# EAGLE board PWM_Block-GiantPanel-v10 (EAGLE 6.6.0), part 1 of 15
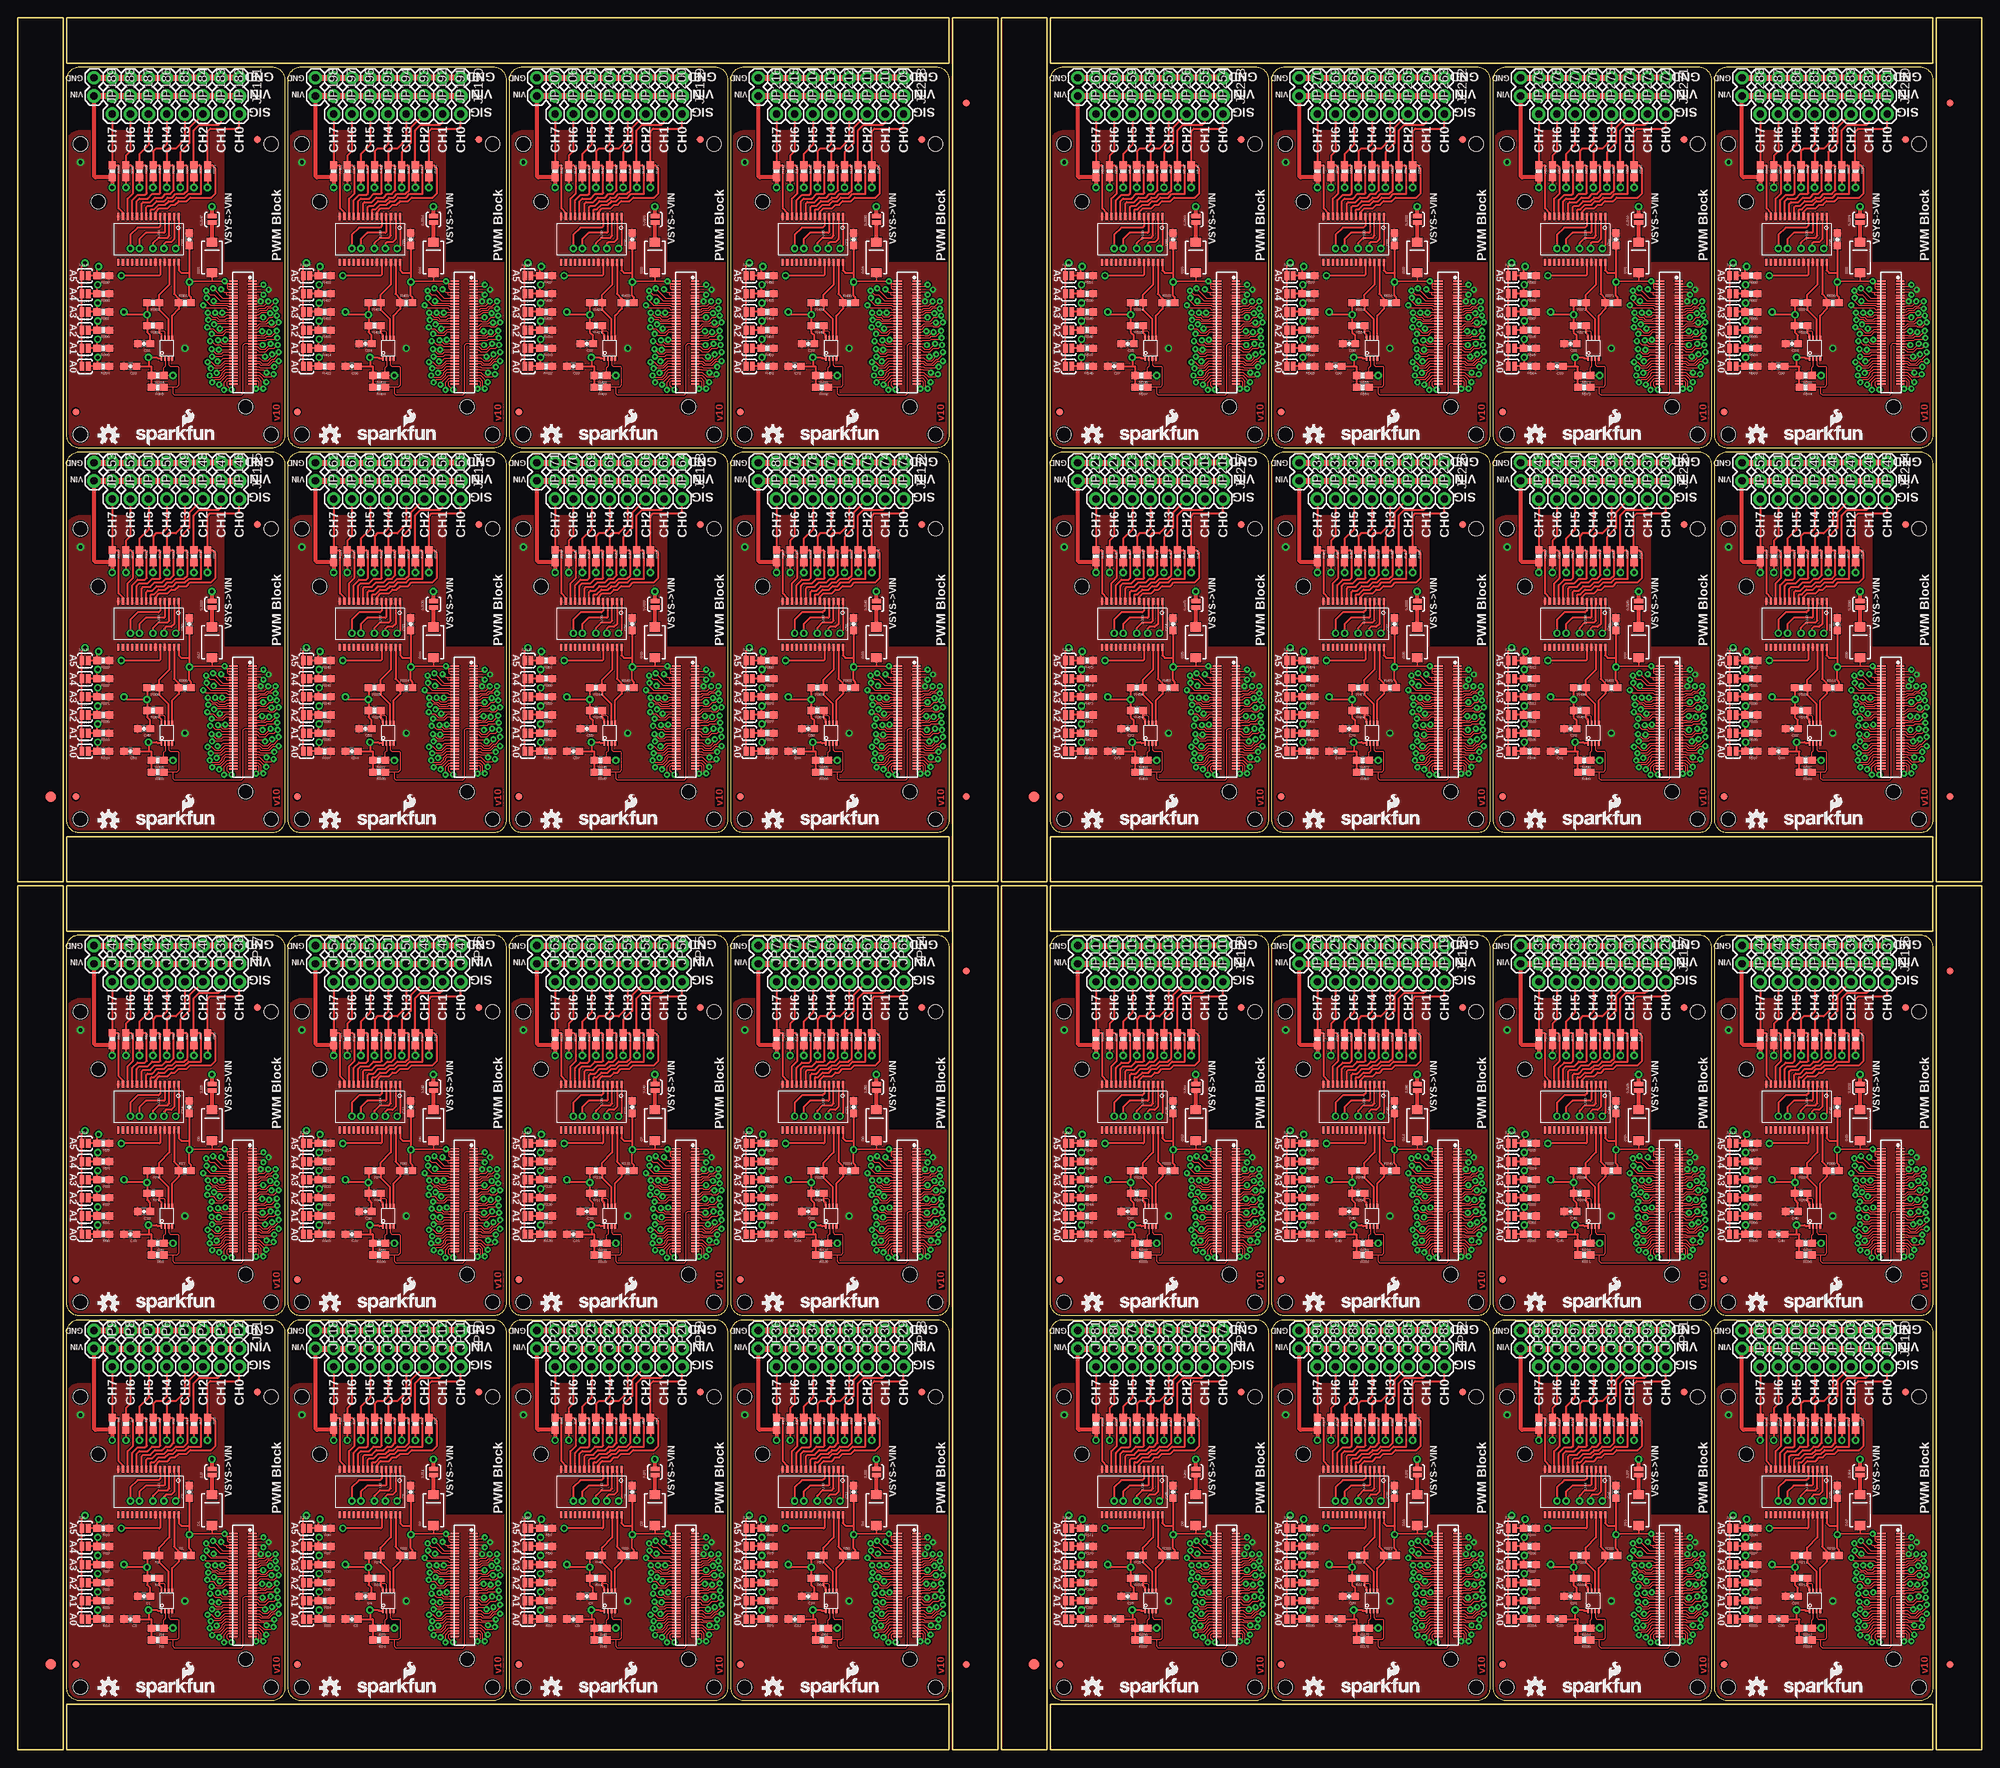
[diagram p0: board, top side]
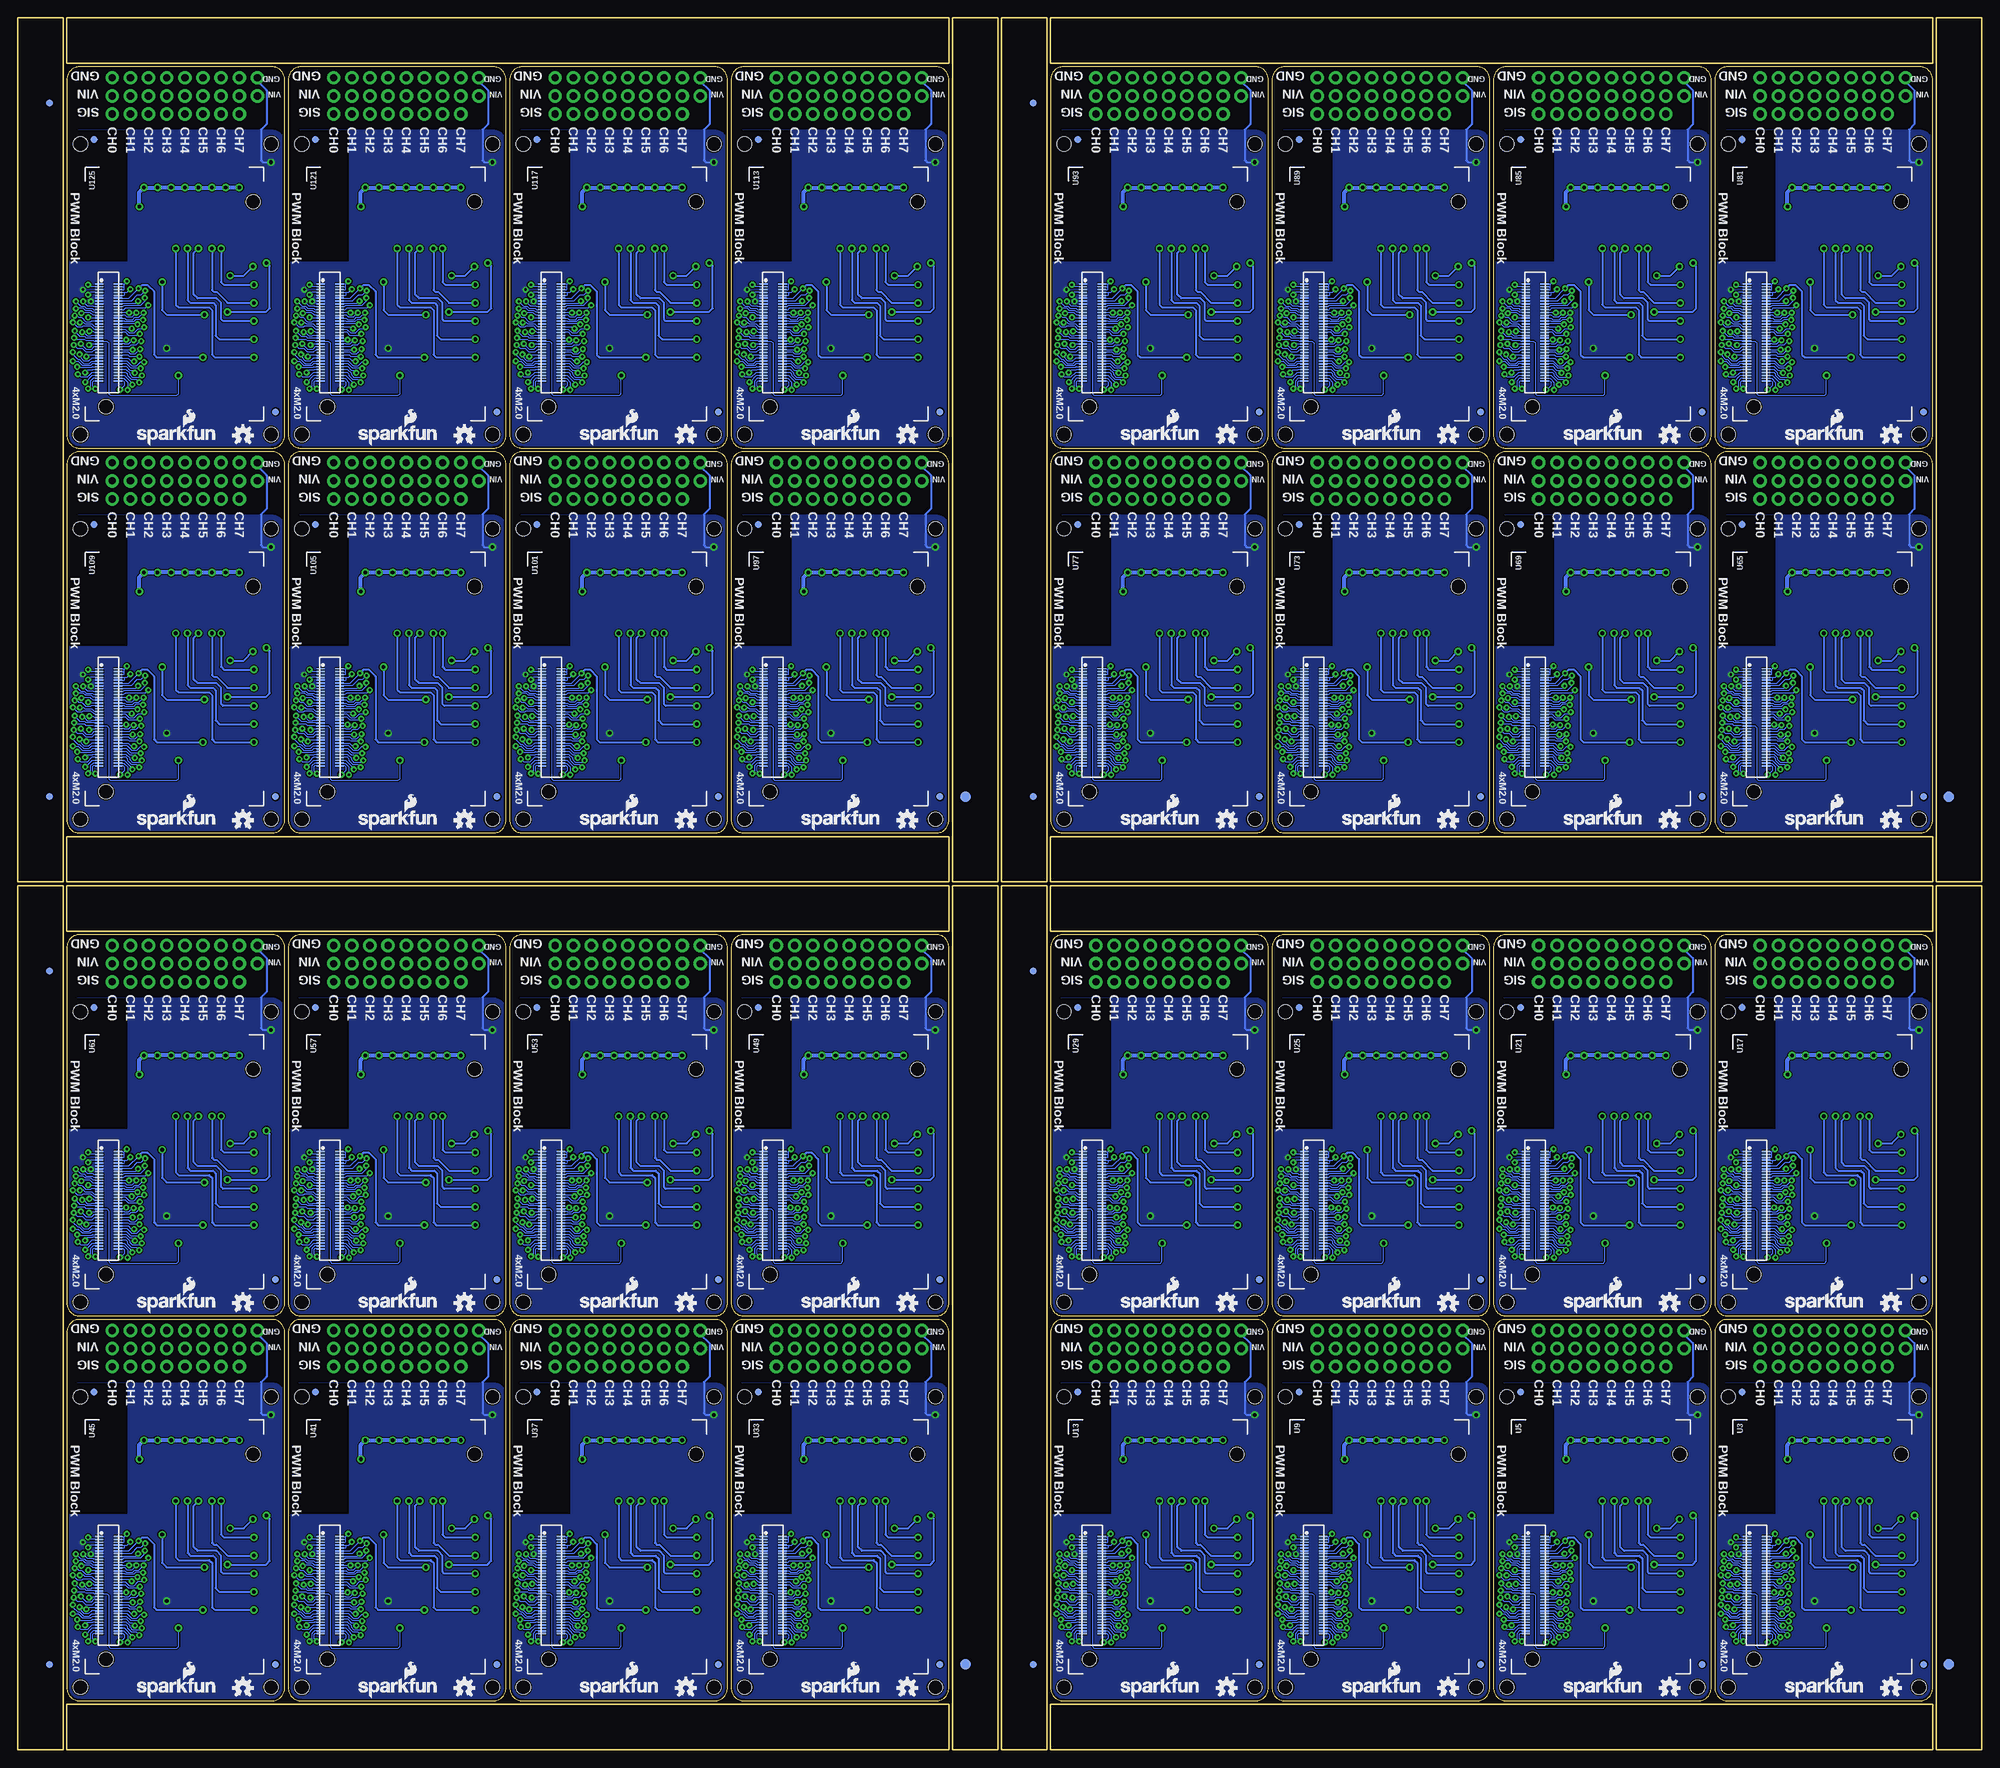
[diagram p1: board, bottom side, seen from below]

Size 274.83 x 242.32 mm. Coordinates in mm from the lower left corner, seen from the top.
Outline: 320 segments
Copper layers (1*16): Top 0.035mm / dielectric 1.5mm / Bottom 0.035mm
Design rules "SparkFun-2-layer *": minimum track width 6mil, minimum drill 13mil, track to track 6mil, track to pad 6mil, pad to pad 6mil, via to via 6mil, smd to smd 6mil, copper to edge 8mil, drill to drill 8mil, minimum pad ring 12mil, minimum via ring 10mil, stop-mask expansion 4mil, vias tented up to drill 20mil, thermal gap 6mil
Holes 2 mm at 35.43,8.76 8.76,8.76 8.76,49.4 35.43,49.4 66.42,8.76 39.75,8.76 39.75,49.4 66.42,49.4 97.41,8.76 70.74,8.76 70.74,49.4 97.41,49.4 128.4,8.76 101.73,8.76 101.73,49.4 128.4,49.4 35.43,62.61 8.76,62.61 8.76,103.25 35.43,103.25 66.42,62.61 39.75,62.61 39.75,103.25 66.42,103.25 97.41,62.61 70.74,62.61 70.74,103.25 97.41,103.25 128.4,62.61 101.73,62.61 101.73,103.25 128.4,103.25 173.1,8.76 146.43,8.76 146.43,49.4 173.1,49.4 204.09,8.76 177.42,8.76 177.42,49.4 204.09,49.4 235.08,8.76 208.41,8.76 208.41,49.4 235.08,49.4 266.06,8.76 239.4,8.76 239.4,49.4 266.06,49.4 173.1,62.61 146.43,62.61 146.43,103.25 173.1,103.25 204.09,62.61 177.42,62.61 177.42,103.25 204.09,103.25 235.08,62.61 208.41,62.61 208.41,103.25 235.08,103.25 266.06,62.61 239.4,62.61 239.4,103.25 266.06,103.25 35.43,130.18 8.76,130.18 8.76,170.81 35.43,170.81 66.42,130.18 39.75,130.18 39.75,170.81 66.42,170.81 97.41,130.18 70.74,130.18 70.74,170.81 97.41,170.81 128.4,130.18 101.73,130.18 101.73,170.81 128.4,170.81 35.43,184.02 8.76,184.02 8.76,224.66 35.43,224.66 66.42,184.02 39.75,184.02 39.75,224.66 66.42,224.66 97.41,184.02 70.74,184.02 70.74,224.66 97.41,224.66 128.4,184.02 101.73,184.02 101.73,224.66 128.4,224.66 173.1,130.18 146.43,130.18 146.43,170.81 173.1,170.81 204.09,130.18 177.42,130.18 177.42,170.81 204.09,170.81 235.08,130.18 208.41,130.18 208.41,170.81 235.08,170.81 266.06,130.18 239.4,130.18 239.4,170.81 266.06,170.81 173.1,184.02 146.43,184.02 146.43,224.66 173.1,224.66 204.09,184.02 177.42,184.02 177.42,224.66 204.09,224.66 235.08,184.02 208.41,184.02 208.41,224.66 235.08,224.66 266.06,184.02 239.4,184.02 239.4,224.66 266.06,224.66
tRestrict: area 29,33 to 37.3,51.3; area 59.9,33 to 68.3,51.3; area 90.9,33 to 99.3,51.3; area 121.9,33 to 130.3,51.3; area 29,86.9 to 37.3,105.2; area 59.9,86.9 to 68.3,105.2; area 90.9,86.9 to 99.3,105.2; area 121.9,86.9 to 130.3,105.2; area 166.6,33 to 175,51.3; area 197.6,33 to 206,51.3; area 228.6,33 to 237,51.3; area 259.6,33 to 268,51.3; 20 more areas; 32 lines
bRestrict: area 29,33 to 37.3,51.3; area 59.9,33 to 68.3,51.3; area 90.9,33 to 99.3,51.3; area 121.9,33 to 130.3,51.3; area 29,86.9 to 37.3,105.2; area 59.9,86.9 to 68.3,105.2; area 90.9,86.9 to 99.3,105.2; area 121.9,86.9 to 130.3,105.2; area 166.6,33 to 175,51.3; area 197.6,33 to 206,51.3; area 228.6,33 to 237,51.3; area 259.6,33 to 268,51.3; 20 more areas

## Footprints (pad centres in the part's own frame; a part is rotated, then mirrored left to right if it is on the bottom)
0603-CAP = smd 1.1 x 1: 1 -0.85,0; 2 0.85,0
SMA-DIODE = smd 1.27 x 1.47: A -2.15,0; C 2.15,0
FIDUCIAL-1.5X3 = smd 1.5 x 1.5: 1 0,0
FIDUCIAL-1X2 = smd 1 x 1: 1 0,0
1X03 = drill 1.016 pad 1.88: 1 0,0; 2 2.54,0; 3 5.08,0
1X02 = drill 1.016 pad 1.88: 1 0,0; 2 2.54,0
0603-RES = smd 1.1 x 1: 1 -0.85,0; 2 0.85,0
PAD-JUMPER-2-NO_YES_SILK = smd 0.635 x 1.27: 1 -0.45,0; 2 0.45,0
TSSOP-28_4MM = smd 1 x 0.3: 1 -3.2,4.225; 2 -3.2,3.575; 3 -3.2,2.925; 4 -3.2,2.275; 5 -3.2,1.625; 6 -3.2,0.975; 7 -3.2,0.325; 8 -3.2,-0.325; 9 -3.2,-0.975; 10 -3.2,-1.625; 11 -3.2,-2.275; 12 -3.2,-2.925; 13 -3.2,-3.575; 14 -3.2,-4.225; 15 3.2,-4.225; 16 3.2,-3.575; 17 3.2,-2.925; 18 3.2,-2.275; 19 3.2,-1.625; 20 3.2,-0.975; 21 3.2,-0.325; 22 3.2,0.325; 23 3.2,0.975; 24 3.2,1.625; 25 3.2,2.275; 26 3.2,2.925; 27 3.2,3.575; 28 3.2,4.225
PCA9306DC-1:1 = smd 0.25 x 0.602: 1 -0.73,-1.446; 2 -0.23,-1.446; 3 0.27,-1.446; 4 0.77,-1.446; 5 0.77,1.431; 6 0.27,1.431; 7 -0.23,1.431; 8 -0.73,1.431
EDISON_DAUGHTER = smd 1.14 x 0.2: 1 1.98,19.17; 2 4.62,19.17; 3 1.98,18.77; 4 4.62,18.77; 5 1.98,18.37; 6 4.62,18.37; 7 1.98,17.97; 8 4.62,17.97; 9 1.98,17.57; 10 4.62,17.57; 11 1.98,17.17; 12 4.62,17.17; 13 1.98,16.77; 14 4.62,16.77; 15 1.98,16.37; 16 4.62,16.37; 17 1.98,15.97; 18 4.62,15.97; 19 1.98,15.57; 20 4.62,15.57; 21 1.98,15.17; 22 4.62,15.17; 23 1.98,14.77; 24 4.62,14.77; 25 1.98,14.37; 26 4.62,14.37; 27 1.98,13.97; 28 4.62,13.97; 29 1.98,13.57; 30 4.62,13.57; 31 1.98,13.17; 32 4.62,13.17; 33 1.98,12.77; 34 4.62,12.77; 35 1.98,12.37; 36 4.62,12.37; 37 1.98,11.97; 38 4.62,11.97; 39 1.98,11.57; 40 4.62,11.57; 41 1.98,11.17; 42 4.62,11.17; 43 1.98,10.77; 44 4.62,10.77; 45 1.98,10.37; 46 4.62,10.37; 47 1.98,9.97; 48 4.62,9.97; 49 1.98,9.57; 50 4.62,9.57; 51 1.98,9.17; 52 4.62,9.17; 53 1.98,8.77; 54 4.62,8.77; 55 1.98,8.37; 56 4.62,8.37; 57 1.98,7.97; 58 4.62,7.97; 59 1.98,7.57; 60 4.62,7.57; 61 1.98,7.17; 62 4.62,7.17; 63 1.98,6.77; 64 4.62,6.77; 65 1.98,6.37; 66 4.62,6.37; 67 1.98,5.97; 68 4.62,5.97; 69 1.98,5.57; 70 4.62,5.57 | hole 2: 23.53,30.67; 2.93,1.98
DF40C-70DP-0.4(51) = smd 0.2 x 1.14 bottom: 1 6.8,1.32; 2 6.8,-1.32; 3 6.4,1.32; 4 6.4,-1.32; 5 6,1.32; 6 6,-1.32; 7 5.6,1.32; 8 5.6,-1.32; 9 5.2,1.32; 10 5.2,-1.32; 11 4.8,1.32; 12 4.8,-1.32; 13 4.4,1.32; 14 4.4,-1.32; 15 4,1.32; 16 4,-1.32; 17 3.6,1.32; 18 3.6,-1.32; 19 3.2,1.32; 20 3.2,-1.32; 21 2.8,1.32; 22 2.8,-1.32; 23 2.4,1.32; 24 2.4,-1.32; 25 2,1.32; 26 2,-1.32; 27 1.6,1.32; 28 1.6,-1.32; 29 1.2,1.32; 30 1.2,-1.32; 31 0.8,1.32; 32 0.8,-1.32; 33 0.4,1.32; 34 0.4,-1.32; 35 0,1.32; 36 0,-1.32; 37 -0.4,1.32; 38 -0.4,-1.32; 39 -0.8,1.32; 40 -0.8,-1.32; 41 -1.2,1.32; 42 -1.2,-1.32; 43 -1.6,1.32; 44 -1.6,-1.32; 45 -2,1.32; 46 -2,-1.32; 47 -2.4,1.32; 48 -2.4,-1.32; 49 -2.8,1.32; 50 -2.8,-1.32; 51 -3.2,1.32; 52 -3.2,-1.32; 53 -3.6,1.32; 54 -3.6,-1.32; 55 -4,1.32; 56 -4,-1.32; 57 -4.4,1.32; 58 -4.4,-1.32; 59 -4.8,1.32; 60 -4.8,-1.32; 61 -5.2,1.32; 62 -5.2,-1.32; 63 -5.6,1.32; 64 -5.6,-1.32; 65 -6,1.32; 66 -6,-1.32; 67 -6.4,1.32; 68 -6.4,-1.32; 69 -6.8,1.32; 70 -6.8,-1.32; NC1 7.2,1.32; NC2 7.2,-1.32; NC3 -7.2,-1.32; NC4 -7.2,1.32

## Placement (x,y rotation side)
C1  0.1uF  [0603-CAP]  17.65,21.46 180 top
C2  0.1uF  [0603-CAP]  24,36.07 90 top
C3  0.1uF  [0603-CAP]  15.75,18.29 180 top
C4  0.1uF  [0603-CAP]  48.64,21.46 180 top
C5  0.1uF  [0603-CAP]  54.99,36.07 90 top
C6  0.1uF  [0603-CAP]  46.74,18.29 180 top
C7  0.1uF  [0603-CAP]  79.63,21.46 180 top
C8  0.1uF  [0603-CAP]  85.98,36.07 90 top
C9  0.1uF  [0603-CAP]  77.72,18.29 180 top
C10  0.1uF  [0603-CAP]  110.62,21.46 180 top
C11  0.1uF  [0603-CAP]  116.97,36.07 90 top
C12  0.1uF  [0603-CAP]  108.71,18.29 180 top
C13  0.1uF  [0603-CAP]  17.65,75.31 180 top
C14  0.1uF  [0603-CAP]  24,89.92 90 top
C15  0.1uF  [0603-CAP]  15.75,72.14 180 top
C16  0.1uF  [0603-CAP]  48.64,75.31 180 top
C17  0.1uF  [0603-CAP]  54.99,89.92 90 top
C18  0.1uF  [0603-CAP]  46.74,72.14 180 top
C19  0.1uF  [0603-CAP]  79.63,75.31 180 top
C20  0.1uF  [0603-CAP]  85.98,89.92 90 top
C21  0.1uF  [0603-CAP]  77.72,72.14 180 top
C22  0.1uF  [0603-CAP]  110.62,75.31 180 top
C23  0.1uF  [0603-CAP]  116.97,89.92 90 top
C24  0.1uF  [0603-CAP]  108.71,72.14 180 top
C25  0.1uF  [0603-CAP]  155.32,21.46 180 top
C26  0.1uF  [0603-CAP]  161.67,36.07 90 top
C27  0.1uF  [0603-CAP]  153.42,18.29 180 top
C28  0.1uF  [0603-CAP]  186.31,21.46 180 top
C29  0.1uF  [0603-CAP]  192.66,36.07 90 top
C30  0.1uF  [0603-CAP]  184.4,18.29 180 top
C31  0.1uF  [0603-CAP]  217.3,21.46 180 top
C32  0.1uF  [0603-CAP]  223.65,36.07 90 top
C33  0.1uF  [0603-CAP]  215.39,18.29 180 top
C34  0.1uF  [0603-CAP]  248.28,21.46 180 top
C35  0.1uF  [0603-CAP]  254.63,36.07 90 top
C36  0.1uF  [0603-CAP]  246.38,18.29 180 top
C37  0.1uF  [0603-CAP]  155.32,75.31 180 top
C38  0.1uF  [0603-CAP]  161.67,89.92 90 top
C39  0.1uF  [0603-CAP]  153.42,72.14 180 top
C40  0.1uF  [0603-CAP]  186.31,75.31 180 top
C41  0.1uF  [0603-CAP]  192.66,89.92 90 top
C42  0.1uF  [0603-CAP]  184.4,72.14 180 top
C43  0.1uF  [0603-CAP]  217.3,75.31 180 top
C44  0.1uF  [0603-CAP]  223.65,89.92 90 top
C45  0.1uF  [0603-CAP]  215.39,72.14 180 top
C46  0.1uF  [0603-CAP]  248.28,75.31 180 top
C47  0.1uF  [0603-CAP]  254.63,89.92 90 top
C48  0.1uF  [0603-CAP]  246.38,72.14 180 top
C49  0.1uF  [0603-CAP]  17.65,142.88 180 top
C50  0.1uF  [0603-CAP]  24,157.48 90 top
C51  0.1uF  [0603-CAP]  15.75,139.7 180 top
C52  0.1uF  [0603-CAP]  48.64,142.88 180 top
C53  0.1uF  [0603-CAP]  54.99,157.48 90 top
C54  0.1uF  [0603-CAP]  46.74,139.7 180 top
C55  0.1uF  [0603-CAP]  79.63,142.88 180 top
C56  0.1uF  [0603-CAP]  85.98,157.48 90 top
C57  0.1uF  [0603-CAP]  77.72,139.7 180 top
C58  0.1uF  [0603-CAP]  110.62,142.88 180 top
C59  0.1uF  [0603-CAP]  116.97,157.48 90 top
C60  0.1uF  [0603-CAP]  108.71,139.7 180 top
C61  0.1uF  [0603-CAP]  17.65,196.72 180 top
C62  0.1uF  [0603-CAP]  24,211.33 90 top
C63  0.1uF  [0603-CAP]  15.75,193.55 180 top
C64  0.1uF  [0603-CAP]  48.64,196.72 180 top
C65  0.1uF  [0603-CAP]  54.99,211.33 90 top
C66  0.1uF  [0603-CAP]  46.74,193.55 180 top
C67  0.1uF  [0603-CAP]  79.63,196.72 180 top
C68  0.1uF  [0603-CAP]  85.98,211.33 90 top
C69  0.1uF  [0603-CAP]  77.72,193.55 180 top
C70  0.1uF  [0603-CAP]  110.62,196.72 180 top
C71  0.1uF  [0603-CAP]  116.97,211.33 90 top
C72  0.1uF  [0603-CAP]  108.71,193.55 180 top
C73  0.1uF  [0603-CAP]  155.32,142.88 180 top
C74  0.1uF  [0603-CAP]  161.67,157.48 90 top
C75  0.1uF  [0603-CAP]  153.42,139.7 180 top
C76  0.1uF  [0603-CAP]  186.31,142.88 180 top
C77  0.1uF  [0603-CAP]  192.66,157.48 90 top
C78  0.1uF  [0603-CAP]  184.4,139.7 180 top
C79  0.1uF  [0603-CAP]  217.3,142.88 180 top
C80  0.1uF  [0603-CAP]  223.65,157.48 90 top
C81  0.1uF  [0603-CAP]  215.39,139.7 180 top
C82  0.1uF  [0603-CAP]  248.28,142.88 180 top
C83  0.1uF  [0603-CAP]  254.63,157.48 90 top
C84  0.1uF  [0603-CAP]  246.38,139.7 180 top
C85  0.1uF  [0603-CAP]  155.32,196.72 180 top
C86  0.1uF  [0603-CAP]  161.67,211.33 90 top
C87  0.1uF  [0603-CAP]  153.42,193.55 180 top
C88  0.1uF  [0603-CAP]  186.31,196.72 180 top
C89  0.1uF  [0603-CAP]  192.66,211.33 90 top
C90  0.1uF  [0603-CAP]  184.4,193.55 180 top
C91  0.1uF  [0603-CAP]  217.3,196.72 180 top
C92  0.1uF  [0603-CAP]  223.65,211.33 90 top
C93  0.1uF  [0603-CAP]  215.39,193.55 180 top
C94  0.1uF  [0603-CAP]  248.28,196.72 180 top
C95  0.1uF  [0603-CAP]  254.63,211.33 90 top
C96  0.1uF  [0603-CAP]  246.38,193.55 180 top
D1  B340A  [SMA-DIODE]  27.18,33.53 90 top
D2  B340A  [SMA-DIODE]  58.17,33.53 90 top
D3  B340A  [SMA-DIODE]  89.15,33.53 90 top
D4  B340A  [SMA-DIODE]  120.14,33.53 90 top
D5  B340A  [SMA-DIODE]  27.18,87.38 90 top
D6  B340A  [SMA-DIODE]  58.17,87.38 90 top
D7  B340A  [SMA-DIODE]  89.15,87.38 90 top
D8  B340A  [SMA-DIODE]  120.14,87.38 90 top
D9  B340A  [SMA-DIODE]  164.85,33.53 90 top
D10  B340A  [SMA-DIODE]  195.83,33.53 90 top
D11  B340A  [SMA-DIODE]  226.82,33.53 90 top
D12  B340A  [SMA-DIODE]  257.81,33.53 90 top
D13  B340A  [SMA-DIODE]  164.85,87.38 90 top
D14  B340A  [SMA-DIODE]  195.83,87.38 90 top
D15  B340A  [SMA-DIODE]  226.82,87.38 90 top
D16  B340A  [SMA-DIODE]  257.81,87.38 90 top
D17  B340A  [SMA-DIODE]  27.18,154.94 90 top
D18  B340A  [SMA-DIODE]  58.17,154.94 90 top
D19  B340A  [SMA-DIODE]  89.15,154.94 90 top
D20  B340A  [SMA-DIODE]  120.14,154.94 90 top
D21  B340A  [SMA-DIODE]  27.18,208.79 90 top
D22  B340A  [SMA-DIODE]  58.17,208.79 90 top
D23  B340A  [SMA-DIODE]  89.15,208.79 90 top
D24  B340A  [SMA-DIODE]  120.14,208.79 90 top
D25  B340A  [SMA-DIODE]  164.85,154.94 90 top
D26  B340A  [SMA-DIODE]  195.83,154.94 90 top
D27  B340A  [SMA-DIODE]  226.82,154.94 90 top
D28  B340A  [SMA-DIODE]  257.81,154.94 90 top
D29  B340A  [SMA-DIODE]  164.85,208.79 90 top
D30  B340A  [SMA-DIODE]  195.83,208.79 90 top
D31  B340A  [SMA-DIODE]  226.82,208.79 90 top
D32  B340A  [SMA-DIODE]  257.81,208.79 90 top
E$1  [FIDUCIAL-1.5X3]  4.57,11.94 0 top
E$2  [FIDUCIAL-1.5X3]  4.57,11.94 0 bottom
E$3  [FIDUCIAL-1X2]  132.72,108.97 180 bottom
E$4  [FIDUCIAL-1X2]  132.72,11.94 0 top
E$5  [FIDUCIAL-1X2]  132.72,11.94 0 bottom
E$6  [FIDUCIAL-1X2]  132.72,108.97 180 top
E$7  [FIDUCIAL-1X2]  270.38,11.94 0 top
E$8  [FIDUCIAL-1X2]  270.38,108.97 180 top
E$9  [FIDUCIAL-1.5X3]  142.24,11.94 0 top
E$10  [FIDUCIAL-1.5X3]  142.24,11.94 0 bottom
E$11  [FIDUCIAL-1X2]  270.38,108.97 180 bottom
E$12  [FIDUCIAL-1X2]  270.38,11.94 0 bottom
E$13  [FIDUCIAL-1X2]  132.72,133.35 0 top
E$14  [FIDUCIAL-1X2]  132.72,230.38 180 top
E$15  [FIDUCIAL-1.5X3]  4.57,133.35 0 top
E$16  [FIDUCIAL-1.5X3]  4.57,133.35 0 bottom
E$17  [FIDUCIAL-1X2]  132.72,230.38 180 bottom
E$18  [FIDUCIAL-1X2]  132.72,133.35 0 bottom
E$19  [FIDUCIAL-1X2]  270.38,133.35 0 top
E$20  [FIDUCIAL-1X2]  270.38,230.38 180 top
E$21  [FIDUCIAL-1.5X3]  142.24,133.35 0 top
E$22  [FIDUCIAL-1.5X3]  142.24,133.35 0 bottom
E$23  [FIDUCIAL-1X2]  270.38,230.38 180 bottom
E$24  [FIDUCIAL-1X2]  270.38,133.35 0 bottom
FID1  FIDUCIAL1X2  [FIDUCIAL-1X2]  8.13,11.94 0 top
FID2  FIDUCIAL1X2  [FIDUCIAL-1X2]  33.53,50.04 0 top
FID3  FIDUCIAL1X2  [FIDUCIAL-1X2]  8.13,11.94 0 bottom
FID4  FIDUCIAL1X2  [FIDUCIAL-1X2]  33.53,50.04 0 bottom
FID5  FIDUCIAL1X2  [FIDUCIAL-1X2]  39.12,11.94 0 top
FID6  FIDUCIAL1X2  [FIDUCIAL-1X2]  64.52,50.04 0 top
FID7  FIDUCIAL1X2  [FIDUCIAL-1X2]  39.12,11.94 0 bottom
FID8  FIDUCIAL1X2  [FIDUCIAL-1X2]  64.52,50.04 0 bottom
FID9  FIDUCIAL1X2  [FIDUCIAL-1X2]  70.1,11.94 0 top
FID10  FIDUCIAL1X2  [FIDUCIAL-1X2]  95.5,50.04 0 top
FID11  FIDUCIAL1X2  [FIDUCIAL-1X2]  70.1,11.94 0 bottom
FID12  FIDUCIAL1X2  [FIDUCIAL-1X2]  95.5,50.04 0 bottom
FID13  FIDUCIAL1X2  [FIDUCIAL-1X2]  101.09,11.94 0 top
FID14  FIDUCIAL1X2  [FIDUCIAL-1X2]  126.49,50.04 0 top
FID15  FIDUCIAL1X2  [FIDUCIAL-1X2]  101.09,11.94 0 bottom
FID16  FIDUCIAL1X2  [FIDUCIAL-1X2]  126.49,50.04 0 bottom
FID17  FIDUCIAL1X2  [FIDUCIAL-1X2]  8.13,65.79 0 top
FID18  FIDUCIAL1X2  [FIDUCIAL-1X2]  33.53,103.89 0 top
FID19  FIDUCIAL1X2  [FIDUCIAL-1X2]  8.13,65.79 0 bottom
FID20  FIDUCIAL1X2  [FIDUCIAL-1X2]  33.53,103.89 0 bottom
FID21  FIDUCIAL1X2  [FIDUCIAL-1X2]  39.12,65.79 0 top
FID22  FIDUCIAL1X2  [FIDUCIAL-1X2]  64.52,103.89 0 top
FID23  FIDUCIAL1X2  [FIDUCIAL-1X2]  39.12,65.79 0 bottom
FID24  FIDUCIAL1X2  [FIDUCIAL-1X2]  64.52,103.89 0 bottom
FID25  FIDUCIAL1X2  [FIDUCIAL-1X2]  70.1,65.79 0 top
FID26  FIDUCIAL1X2  [FIDUCIAL-1X2]  95.5,103.89 0 top
FID27  FIDUCIAL1X2  [FIDUCIAL-1X2]  70.1,65.79 0 bottom
FID28  FIDUCIAL1X2  [FIDUCIAL-1X2]  95.5,103.89 0 bottom
FID29  FIDUCIAL1X2  [FIDUCIAL-1X2]  101.09,65.79 0 top
FID30  FIDUCIAL1X2  [FIDUCIAL-1X2]  126.49,103.89 0 top
FID31  FIDUCIAL1X2  [FIDUCIAL-1X2]  101.09,65.79 0 bottom
FID32  FIDUCIAL1X2  [FIDUCIAL-1X2]  126.49,103.89 0 bottom
FID33  FIDUCIAL1X2  [FIDUCIAL-1X2]  145.8,11.94 0 top
FID34  FIDUCIAL1X2  [FIDUCIAL-1X2]  171.2,50.04 0 top
FID35  FIDUCIAL1X2  [FIDUCIAL-1X2]  145.8,11.94 0 bottom
FID36  FIDUCIAL1X2  [FIDUCIAL-1X2]  171.2,50.04 0 bottom
FID37  FIDUCIAL1X2  [FIDUCIAL-1X2]  176.78,11.94 0 top
FID38  FIDUCIAL1X2  [FIDUCIAL-1X2]  202.18,50.04 0 top
FID39  FIDUCIAL1X2  [FIDUCIAL-1X2]  176.78,11.94 0 bottom
FID40  FIDUCIAL1X2  [FIDUCIAL-1X2]  202.18,50.04 0 bottom
FID41  FIDUCIAL1X2  [FIDUCIAL-1X2]  207.77,11.94 0 top
FID42  FIDUCIAL1X2  [FIDUCIAL-1X2]  233.17,50.04 0 top
FID43  FIDUCIAL1X2  [FIDUCIAL-1X2]  207.77,11.94 0 bottom
FID44  FIDUCIAL1X2  [FIDUCIAL-1X2]  233.17,50.04 0 bottom
FID45  FIDUCIAL1X2  [FIDUCIAL-1X2]  238.76,11.94 0 top
FID46  FIDUCIAL1X2  [FIDUCIAL-1X2]  264.16,50.04 0 top
FID47  FIDUCIAL1X2  [FIDUCIAL-1X2]  238.76,11.94 0 bottom
FID48  FIDUCIAL1X2  [FIDUCIAL-1X2]  264.16,50.04 0 bottom
FID49  FIDUCIAL1X2  [FIDUCIAL-1X2]  145.8,65.79 0 top
FID50  FIDUCIAL1X2  [FIDUCIAL-1X2]  171.2,103.89 0 top
FID51  FIDUCIAL1X2  [FIDUCIAL-1X2]  145.8,65.79 0 bottom
FID52  FIDUCIAL1X2  [FIDUCIAL-1X2]  171.2,103.89 0 bottom
FID53  FIDUCIAL1X2  [FIDUCIAL-1X2]  176.78,65.79 0 top
FID54  FIDUCIAL1X2  [FIDUCIAL-1X2]  202.18,103.89 0 top
FID55  FIDUCIAL1X2  [FIDUCIAL-1X2]  176.78,65.79 0 bottom
FID56  FIDUCIAL1X2  [FIDUCIAL-1X2]  202.18,103.89 0 bottom
FID57  FIDUCIAL1X2  [FIDUCIAL-1X2]  207.77,65.79 0 top
FID58  FIDUCIAL1X2  [FIDUCIAL-1X2]  233.17,103.89 0 top
FID59  FIDUCIAL1X2  [FIDUCIAL-1X2]  207.77,65.79 0 bottom
FID60  FIDUCIAL1X2  [FIDUCIAL-1X2]  233.17,103.89 0 bottom
FID61  FIDUCIAL1X2  [FIDUCIAL-1X2]  238.76,65.79 0 top
FID62  FIDUCIAL1X2  [FIDUCIAL-1X2]  264.16,103.89 0 top
FID63  FIDUCIAL1X2  [FIDUCIAL-1X2]  238.76,65.79 0 bottom
FID64  FIDUCIAL1X2  [FIDUCIAL-1X2]  264.16,103.89 0 bottom
FID65  FIDUCIAL1X2  [FIDUCIAL-1X2]  8.13,133.35 0 top
FID66  FIDUCIAL1X2  [FIDUCIAL-1X2]  33.53,171.45 0 top
FID67  FIDUCIAL1X2  [FIDUCIAL-1X2]  8.13,133.35 0 bottom
FID68  FIDUCIAL1X2  [FIDUCIAL-1X2]  33.53,171.45 0 bottom
FID69  FIDUCIAL1X2  [FIDUCIAL-1X2]  39.12,133.35 0 top
FID70  FIDUCIAL1X2  [FIDUCIAL-1X2]  64.52,171.45 0 top
FID71  FIDUCIAL1X2  [FIDUCIAL-1X2]  39.12,133.35 0 bottom
FID72  FIDUCIAL1X2  [FIDUCIAL-1X2]  64.52,171.45 0 bottom
FID73  FIDUCIAL1X2  [FIDUCIAL-1X2]  70.1,133.35 0 top
FID74  FIDUCIAL1X2  [FIDUCIAL-1X2]  95.5,171.45 0 top
FID75  FIDUCIAL1X2  [FIDUCIAL-1X2]  70.1,133.35 0 bottom
FID76  FIDUCIAL1X2  [FIDUCIAL-1X2]  95.5,171.45 0 bottom
FID77  FIDUCIAL1X2  [FIDUCIAL-1X2]  101.09,133.35 0 top
FID78  FIDUCIAL1X2  [FIDUCIAL-1X2]  126.49,171.45 0 top
FID79  FIDUCIAL1X2  [FIDUCIAL-1X2]  101.09,133.35 0 bottom
FID80  FIDUCIAL1X2  [FIDUCIAL-1X2]  126.49,171.45 0 bottom
FID81  FIDUCIAL1X2  [FIDUCIAL-1X2]  8.13,187.2 0 top
FID82  FIDUCIAL1X2  [FIDUCIAL-1X2]  33.53,225.3 0 top
FID83  FIDUCIAL1X2  [FIDUCIAL-1X2]  8.13,187.2 0 bottom
FID84  FIDUCIAL1X2  [FIDUCIAL-1X2]  33.53,225.3 0 bottom
FID85  FIDUCIAL1X2  [FIDUCIAL-1X2]  39.12,187.2 0 top
FID86  FIDUCIAL1X2  [FIDUCIAL-1X2]  64.52,225.3 0 top
FID87  FIDUCIAL1X2  [FIDUCIAL-1X2]  39.12,187.2 0 bottom
FID88  FIDUCIAL1X2  [FIDUCIAL-1X2]  64.52,225.3 0 bottom
FID89  FIDUCIAL1X2  [FIDUCIAL-1X2]  70.1,187.2 0 top
FID90  FIDUCIAL1X2  [FIDUCIAL-1X2]  95.5,225.3 0 top
FID91  FIDUCIAL1X2  [FIDUCIAL-1X2]  70.1,187.2 0 bottom
FID92  FIDUCIAL1X2  [FIDUCIAL-1X2]  95.5,225.3 0 bottom
FID93  FIDUCIAL1X2  [FIDUCIAL-1X2]  101.09,187.2 0 top
FID94  FIDUCIAL1X2  [FIDUCIAL-1X2]  126.49,225.3 0 top
FID95  FIDUCIAL1X2  [FIDUCIAL-1X2]  101.09,187.2 0 bottom
FID96  FIDUCIAL1X2  [FIDUCIAL-1X2]  126.49,225.3 0 bottom
FID97  FIDUCIAL1X2  [FIDUCIAL-1X2]  145.8,133.35 0 top
FID98  FIDUCIAL1X2  [FIDUCIAL-1X2]  171.2,171.45 0 top
FID99  FIDUCIAL1X2  [FIDUCIAL-1X2]  145.8,133.35 0 bottom
FID100  FIDUCIAL1X2  [FIDUCIAL-1X2]  171.2,171.45 0 bottom
FID101  FIDUCIAL1X2  [FIDUCIAL-1X2]  176.78,133.35 0 top
FID102  FIDUCIAL1X2  [FIDUCIAL-1X2]  202.18,171.45 0 top
FID103  FIDUCIAL1X2  [FIDUCIAL-1X2]  176.78,133.35 0 bottom
FID104  FIDUCIAL1X2  [FIDUCIAL-1X2]  202.18,171.45 0 bottom
FID105  FIDUCIAL1X2  [FIDUCIAL-1X2]  207.77,133.35 0 top
FID106  FIDUCIAL1X2  [FIDUCIAL-1X2]  233.17,171.45 0 top
FID107  FIDUCIAL1X2  [FIDUCIAL-1X2]  207.77,133.35 0 bottom
FID108  FIDUCIAL1X2  [FIDUCIAL-1X2]  233.17,171.45 0 bottom
FID109  FIDUCIAL1X2  [FIDUCIAL-1X2]  238.76,133.35 0 top
FID110  FIDUCIAL1X2  [FIDUCIAL-1X2]  264.16,171.45 0 top
FID111  FIDUCIAL1X2  [FIDUCIAL-1X2]  238.76,133.35 0 bottom
FID112  FIDUCIAL1X2  [FIDUCIAL-1X2]  264.16,171.45 0 bottom
FID113  FIDUCIAL1X2  [FIDUCIAL-1X2]  145.8,187.2 0 top
FID114  FIDUCIAL1X2  [FIDUCIAL-1X2]  171.2,225.3 0 top
FID115  FIDUCIAL1X2  [FIDUCIAL-1X2]  145.8,187.2 0 bottom
FID116  FIDUCIAL1X2  [FIDUCIAL-1X2]  171.2,225.3 0 bottom
FID117  FIDUCIAL1X2  [FIDUCIAL-1X2]  176.78,187.2 0 top
FID118  FIDUCIAL1X2  [FIDUCIAL-1X2]  202.18,225.3 0 top
FID119  FIDUCIAL1X2  [FIDUCIAL-1X2]  176.78,187.2 0 bottom
FID120  FIDUCIAL1X2  [FIDUCIAL-1X2]  202.18,225.3 0 bottom
FID121  FIDUCIAL1X2  [FIDUCIAL-1X2]  207.77,187.2 0 top
FID122  FIDUCIAL1X2  [FIDUCIAL-1X2]  233.17,225.3 0 top
FID123  FIDUCIAL1X2  [FIDUCIAL-1X2]  207.77,187.2 0 bottom
FID124  FIDUCIAL1X2  [FIDUCIAL-1X2]  233.17,225.3 0 bottom
FID125  FIDUCIAL1X2  [FIDUCIAL-1X2]  238.76,187.2 0 top
FID126  FIDUCIAL1X2  [FIDUCIAL-1X2]  264.16,225.3 0 top
FID127  FIDUCIAL1X2  [FIDUCIAL-1X2]  238.76,187.2 0 bottom
FID128  FIDUCIAL1X2  [FIDUCIAL-1X2]  264.16,225.3 0 bottom
JP1  [1X03]  30.99,58.67 270 top
JP2  [1X03]  28.45,58.67 270 top
JP3  [1X03]  25.91,58.67 270 top
JP4  [1X03]  23.37,58.67 270 top
JP5  [1X03]  20.83,58.67 270 top
JP6  [1X03]  18.29,58.67 270 top
JP7  [1X03]  15.75,58.67 270 top
JP8  [1X03]  13.21,58.67 270 top
JP9  M02PTH  [1X02]  10.67,58.67 270 top
JP10  [1X03]  61.98,58.67 270 top
JP11  [1X03]  59.44,58.67 270 top
JP12  [1X03]  56.9,58.67 270 top
JP13  [1X03]  54.36,58.67 270 top
JP14  [1X03]  51.82,58.67 270 top
JP15  [1X03]  49.28,58.67 270 top
JP16  [1X03]  46.74,58.67 270 top
JP17  [1X03]  44.2,58.67 270 top
JP18  M02PTH  [1X02]  41.66,58.67 270 top
JP19  [1X03]  92.96,58.67 270 top
JP20  [1X03]  90.42,58.67 270 top
JP21  [1X03]  87.88,58.67 270 top
JP22  [1X03]  85.34,58.67 270 top
JP23  [1X03]  82.8,58.67 270 top
JP24  [1X03]  80.26,58.67 270 top
JP25  [1X03]  77.72,58.67 270 top
JP26  [1X03]  75.18,58.67 270 top
JP27  M02PTH  [1X02]  72.64,58.67 270 top
JP28  [1X03]  123.95,58.67 270 top
JP29  [1X03]  121.41,58.67 270 top
JP30  [1X03]  118.87,58.67 270 top
JP31  [1X03]  116.33,58.67 270 top
JP32  [1X03]  113.79,58.67 270 top
JP33  [1X03]  111.25,58.67 270 top
JP34  [1X03]  108.71,58.67 270 top
JP35  [1X03]  106.17,58.67 270 top
JP36  M02PTH  [1X02]  103.63,58.67 270 top
JP37  [1X03]  30.99,112.52 270 top
JP38  [1X03]  28.45,112.52 270 top
JP39  [1X03]  25.91,112.52 270 top
JP40  [1X03]  23.37,112.52 270 top
JP41  [1X03]  20.83,112.52 270 top
JP42  [1X03]  18.29,112.52 270 top
JP43  [1X03]  15.75,112.52 270 top
JP44  [1X03]  13.21,112.52 270 top
JP45  M02PTH  [1X02]  10.67,112.52 270 top
JP46  [1X03]  61.98,112.52 270 top
JP47  [1X03]  59.44,112.52 270 top
JP48  [1X03]  56.9,112.52 270 top
JP49  [1X03]  54.36,112.52 270 top
JP50  [1X03]  51.82,112.52 270 top
JP51  [1X03]  49.28,112.52 270 top
JP52  [1X03]  46.74,112.52 270 top
JP53  [1X03]  44.2,112.52 270 top
JP54  M02PTH  [1X02]  41.66,112.52 270 top
JP55  [1X03]  92.96,112.52 270 top
JP56  [1X03]  90.42,112.52 270 top
JP57  [1X03]  87.88,112.52 270 top
JP58  [1X03]  85.34,112.52 270 top
JP59  [1X03]  82.8,112.52 270 top
JP60  [1X03]  80.26,112.52 270 top
JP61  [1X03]  77.72,112.52 270 top
JP62  [1X03]  75.18,112.52 270 top
JP63  M02PTH  [1X02]  72.64,112.52 270 top
JP64  [1X03]  123.95,112.52 270 top
JP65  [1X03]  121.41,112.52 270 top
JP66  [1X03]  118.87,112.52 270 top
JP67  [1X03]  116.33,112.52 270 top
JP68  [1X03]  113.79,112.52 270 top
JP69  [1X03]  111.25,112.52 270 top
JP70  [1X03]  108.71,112.52 270 top
JP71  [1X03]  106.17,112.52 270 top
JP72  M02PTH  [1X02]  103.63,112.52 270 top
JP73  [1X03]  168.66,58.67 270 top
JP74  [1X03]  166.12,58.67 270 top
JP75  [1X03]  163.58,58.67 270 top
JP76  [1X03]  161.04,58.67 270 top
JP77  [1X03]  158.5,58.67 270 top
JP78  [1X03]  155.96,58.67 270 top
JP79  [1X03]  153.42,58.67 270 top
JP80  [1X03]  150.88,58.67 270 top
JP81  M02PTH  [1X02]  148.34,58.67 270 top
JP82  [1X03]  199.64,58.67 270 top
JP83  [1X03]  197.1,58.67 270 top
JP84  [1X03]  194.56,58.67 270 top
JP85  [1X03]  192.02,58.67 270 top
JP86  [1X03]  189.48,58.67 270 top
JP87  [1X03]  186.94,58.67 270 top
JP88  [1X03]  184.4,58.67 270 top
JP89  [1X03]  181.86,58.67 270 top
JP90  M02PTH  [1X02]  179.32,58.67 270 top
JP91  [1X03]  230.63,58.67 270 top
JP92  [1X03]  228.09,58.67 270 top
JP93  [1X03]  225.55,58.67 270 top
JP94  [1X03]  223.01,58.67 270 top
JP95  [1X03]  220.47,58.67 270 top
JP96  [1X03]  217.93,58.67 270 top
JP97  [1X03]  215.39,58.67 270 top
JP98  [1X03]  212.85,58.67 270 top
JP99  M02PTH  [1X02]  210.31,58.67 270 top
JP100  [1X03]  261.62,58.67 270 top
JP101  [1X03]  259.08,58.67 270 top
JP102  [1X03]  256.54,58.67 270 top
JP103  [1X03]  254,58.67 270 top
JP104  [1X03]  251.46,58.67 270 top
JP105  [1X03]  248.92,58.67 270 top
JP106  [1X03]  246.38,58.67 270 top
JP107  [1X03]  243.84,58.67 270 top
JP108  M02PTH  [1X02]  241.3,58.67 270 top
JP109  [1X03]  168.66,112.52 270 top
JP110  [1X03]  166.12,112.52 270 top
JP111  [1X03]  163.58,112.52 270 top
JP112  [1X03]  161.04,112.52 270 top
JP113  [1X03]  158.5,112.52 270 top
JP114  [1X03]  155.96,112.52 270 top
JP115  [1X03]  153.42,112.52 270 top
JP116  [1X03]  150.88,112.52 270 top
JP117  M02PTH  [1X02]  148.34,112.52 270 top
JP118  [1X03]  199.64,112.52 270 top
JP119  [1X03]  197.1,112.52 270 top
JP120  [1X03]  194.56,112.52 270 top
JP121  [1X03]  192.02,112.52 270 top
JP122  [1X03]  189.48,112.52 270 top
JP123  [1X03]  186.94,112.52 270 top
JP124  [1X03]  184.4,112.52 270 top
JP125  [1X03]  181.86,112.52 270 top
JP126  M02PTH  [1X02]  179.32,112.52 270 top
JP127  [1X03]  230.63,112.52 270 top
JP128  [1X03]  228.09,112.52 270 top
JP129  [1X03]  225.55,112.52 270 top
JP130  [1X03]  223.01,112.52 270 top
JP131  [1X03]  220.47,112.52 270 top
JP132  [1X03]  217.93,112.52 270 top
JP133  [1X03]  215.39,112.52 270 top
JP134  [1X03]  212.85,112.52 270 top
JP135  M02PTH  [1X02]  210.31,112.52 270 top
JP136  [1X03]  261.62,112.52 270 top
JP137  [1X03]  259.08,112.52 270 top
JP138  [1X03]  256.54,112.52 270 top
JP139  [1X03]  254,112.52 270 top
JP140  [1X03]  251.46,112.52 270 top
JP141  [1X03]  248.92,112.52 270 top
JP142  [1X03]  246.38,112.52 270 top
JP143  [1X03]  243.84,112.52 270 top
JP144  M02PTH  [1X02]  241.3,112.52 270 top
JP145  [1X03]  30.99,180.09 270 top
JP146  [1X03]  28.45,180.09 270 top
JP147  [1X03]  25.91,180.09 270 top
JP148  [1X03]  23.37,180.09 270 top
JP149  [1X03]  20.83,180.09 270 top
JP150  [1X03]  18.29,180.09 270 top
JP151  [1X03]  15.75,180.09 270 top
JP152  [1X03]  13.21,180.09 270 top
JP153  M02PTH  [1X02]  10.67,180.09 270 top
JP154  [1X03]  61.98,180.09 270 top
JP155  [1X03]  59.44,180.09 270 top
JP156  [1X03]  56.9,180.09 270 top
JP157  [1X03]  54.36,180.09 270 top
JP158  [1X03]  51.82,180.09 270 top
JP159  [1X03]  49.28,180.09 270 top
JP160  [1X03]  46.74,180.09 270 top
JP161  [1X03]  44.2,180.09 270 top
JP162  M02PTH  [1X02]  41.66,180.09 270 top
JP163  [1X03]  92.96,180.09 270 top
JP164  [1X03]  90.42,180.09 270 top
JP165  [1X03]  87.88,180.09 270 top
JP166  [1X03]  85.34,180.09 270 top
JP167  [1X03]  82.8,180.09 270 top
JP168  [1X03]  80.26,180.09 270 top
JP169  [1X03]  77.72,180.09 270 top
JP170  [1X03]  75.18,180.09 270 top
JP171  M02PTH  [1X02]  72.64,180.09 270 top
JP172  [1X03]  123.95,180.09 270 top
JP173  [1X03]  121.41,180.09 270 top
JP174  [1X03]  118.87,180.09 270 top
JP175  [1X03]  116.33,180.09 270 top
JP176  [1X03]  113.79,180.09 270 top
JP177  [1X03]  111.25,180.09 270 top
JP178  [1X03]  108.71,180.09 270 top
JP179  [1X03]  106.17,180.09 270 top
JP180  M02PTH  [1X02]  103.63,180.09 270 top
JP181  [1X03]  30.99,233.93 270 top
JP182  [1X03]  28.45,233.93 270 top
JP183  [1X03]  25.91,233.93 270 top
JP184  [1X03]  23.37,233.93 270 top
JP185  [1X03]  20.83,233.93 270 top
JP186  [1X03]  18.29,233.93 270 top
JP187  [1X03]  15.75,233.93 270 top
JP188  [1X03]  13.21,233.93 270 top
JP189  M02PTH  [1X02]  10.67,233.93 270 top
JP190  [1X03]  61.98,233.93 270 top
JP191  [1X03]  59.44,233.93 270 top
JP192  [1X03]  56.9,233.93 270 top
JP193  [1X03]  54.36,233.93 270 top
JP194  [1X03]  51.82,233.93 270 top
JP195  [1X03]  49.28,233.93 270 top
JP196  [1X03]  46.74,233.93 270 top
JP197  [1X03]  44.2,233.93 270 top
JP198  M02PTH  [1X02]  41.66,233.93 270 top
JP199  [1X03]  92.96,233.93 270 top
JP200  [1X03]  90.42,233.93 270 top
JP201  [1X03]  87.88,233.93 270 top
JP202  [1X03]  85.34,233.93 270 top
JP203  [1X03]  82.8,233.93 270 top
JP204  [1X03]  80.26,233.93 270 top
JP205  [1X03]  77.72,233.93 270 top
JP206  [1X03]  75.18,233.93 270 top
JP207  M02PTH  [1X02]  72.64,233.93 270 top
JP208  [1X03]  123.95,233.93 270 top
JP209  [1X03]  121.41,233.93 270 top
JP210  [1X03]  118.87,233.93 270 top
JP211  [1X03]  116.33,233.93 270 top
JP212  [1X03]  113.79,233.93 270 top
JP213  [1X03]  111.25,233.93 270 top
JP214  [1X03]  108.71,233.93 270 top
JP215  [1X03]  106.17,233.93 270 top
JP216  M02PTH  [1X02]  103.63,233.93 270 top
JP217  [1X03]  168.66,180.09 270 top
JP218  [1X03]  166.12,180.09 270 top
JP219  [1X03]  163.58,180.09 270 top
JP220  [1X03]  161.04,180.09 270 top
JP221  [1X03]  158.5,180.09 270 top
JP222  [1X03]  155.96,180.09 270 top
JP223  [1X03]  153.42,180.09 270 top
JP224  [1X03]  150.88,180.09 270 top
JP225  M02PTH  [1X02]  148.34,180.09 270 top
JP226  [1X03]  199.64,180.09 270 top
JP227  [1X03]  197.1,180.09 270 top
JP228  [1X03]  194.56,180.09 270 top
JP229  [1X03]  192.02,180.09 270 top
JP230  [1X03]  189.48,180.09 270 top
JP231  [1X03]  186.94,180.09 270 top
JP232  [1X03]  184.4,180.09 270 top
JP233  [1X03]  181.86,180.09 270 top
JP234  M02PTH  [1X02]  179.32,180.09 270 top
JP235  [1X03]  230.63,180.09 270 top
JP236  [1X03]  228.09,180.09 270 top
JP237  [1X03]  225.55,180.09 270 top
JP238  [1X03]  223.01,180.09 270 top
JP239  [1X03]  220.47,180.09 270 top
JP240  [1X03]  217.93,180.09 270 top
JP241  [1X03]  215.39,180.09 270 top
JP242  [1X03]  212.85,180.09 270 top
JP243  M02PTH  [1X02]  210.31,180.09 270 top
JP244  [1X03]  261.62,180.09 270 top
JP245  [1X03]  259.08,180.09 270 top
JP246  [1X03]  256.54,180.09 270 top
JP247  [1X03]  254,180.09 270 top
JP248  [1X03]  251.46,180.09 270 top
JP249  [1X03]  248.92,180.09 270 top
JP250  [1X03]  246.38,180.09 270 top
JP251  [1X03]  243.84,180.09 270 top
JP252  M02PTH  [1X02]  241.3,180.09 270 top
JP253  [1X03]  168.66,233.93 270 top
JP254  [1X03]  166.12,233.93 270 top
JP255  [1X03]  163.58,233.93 270 top
JP256  [1X03]  161.04,233.93 270 top
JP257  [1X03]  158.5,233.93 270 top
JP258  [1X03]  155.96,233.93 270 top
JP259  [1X03]  153.42,233.93 270 top
JP260  [1X03]  150.88,233.93 270 top
JP261  M02PTH  [1X02]  148.34,233.93 270 top
JP262  [1X03]  199.64,233.93 270 top
JP263  [1X03]  197.1,233.93 270 top
JP264  [1X03]  194.56,233.93 270 top
JP265  [1X03]  192.02,233.93 270 top
JP266  [1X03]  189.48,233.93 270 top
JP267  [1X03]  186.94,233.93 270 top
JP268  [1X03]  184.4,233.93 270 top
JP269  [1X03]  181.86,233.93 270 top
JP270  M02PTH  [1X02]  179.32,233.93 270 top
JP271  [1X03]  230.63,233.93 270 top
JP272  [1X03]  228.09,233.93 270 top
JP273  [1X03]  225.55,233.93 270 top
JP274  [1X03]  223.01,233.93 270 top
JP275  [1X03]  220.47,233.93 270 top
JP276  [1X03]  217.93,233.93 270 top
JP277  [1X03]  215.39,233.93 270 top
JP278  [1X03]  212.85,233.93 270 top
JP279  M02PTH  [1X02]  210.31,233.93 270 top
JP280  [1X03]  261.62,233.93 270 top
JP281  [1X03]  259.08,233.93 270 top
JP282  [1X03]  256.54,233.93 270 top
JP283  [1X03]  254,233.93 270 top
JP284  [1X03]  251.46,233.93 270 top
JP285  [1X03]  248.92,233.93 270 top
JP286  [1X03]  246.38,233.93 270 top
JP287  [1X03]  243.84,233.93 270 top
JP288  M02PTH  [1X02]  241.3,233.93 270 top
LOGO1  SFE_LOGO_NAME_FLAME.1_INCH  [SFE_LOGO_NAME_FLAME_.1]  16.13,7.11 0 top
LOGO2  OSHW-LOGOS  [OSHW-LOGO-S]  12.7,8.64 0 bottom
LOGO3  SFE_LOGO_NAME_FLAME.1_INCH  [SFE_LOGO_NAME_FLAME_.1]  27.94,7.11 0 bottom
LOGO4  OSHW-LOGOS  [OSHW-LOGO-S]  12.7,8.64 0 top
LOGO5  OSHW-LOGOS  [OSHW-LOGO-S]  43.69,8.64 0 bottom
LOGO6  SFE_LOGO_NAME_FLAME.1_INCH  [SFE_LOGO_NAME_FLAME_.1]  58.93,7.11 0 bottom
LOGO7  SFE_LOGO_NAME_FLAME.1_INCH  [SFE_LOGO_NAME_FLAME_.1]  47.12,7.11 0 top
LOGO8  OSHW-LOGOS  [OSHW-LOGO-S]  43.69,8.64 0 top
LOGO9  OSHW-LOGOS  [OSHW-LOGO-S]  74.68,8.64 0 bottom
LOGO10  SFE_LOGO_NAME_FLAME.1_INCH  [SFE_LOGO_NAME_FLAME_.1]  89.92,7.11 0 bottom
LOGO11  SFE_LOGO_NAME_FLAME.1_INCH  [SFE_LOGO_NAME_FLAME_.1]  78.11,7.11 0 top
LOGO12  OSHW-LOGOS  [OSHW-LOGO-S]  74.68,8.64 0 top
LOGO13  OSHW-LOGOS  [OSHW-LOGO-S]  105.66,8.64 0 bottom
LOGO14  SFE_LOGO_NAME_FLAME.1_INCH  [SFE_LOGO_NAME_FLAME_.1]  120.9,7.11 0 bottom
LOGO15  SFE_LOGO_NAME_FLAME.1_INCH  [SFE_LOGO_NAME_FLAME_.1]  109.09,7.11 0 top
LOGO16  OSHW-LOGOS  [OSHW-LOGO-S]  105.66,8.64 0 top
LOGO17  OSHW-LOGOS  [OSHW-LOGO-S]  12.7,62.48 0 bottom
LOGO18  SFE_LOGO_NAME_FLAME.1_INCH  [SFE_LOGO_NAME_FLAME_.1]  27.94,60.96 0 bottom
LOGO19  SFE_LOGO_NAME_FLAME.1_INCH  [SFE_LOGO_NAME_FLAME_.1]  16.13,60.96 0 top
LOGO20  OSHW-LOGOS  [OSHW-LOGO-S]  12.7,62.48 0 top
LOGO21  OSHW-LOGOS  [OSHW-LOGO-S]  43.69,62.48 0 bottom
LOGO22  SFE_LOGO_NAME_FLAME.1_INCH  [SFE_LOGO_NAME_FLAME_.1]  58.93,60.96 0 bottom
LOGO23  SFE_LOGO_NAME_FLAME.1_INCH  [SFE_LOGO_NAME_FLAME_.1]  47.12,60.96 0 top
LOGO24  OSHW-LOGOS  [OSHW-LOGO-S]  43.69,62.48 0 top
LOGO25  OSHW-LOGOS  [OSHW-LOGO-S]  74.68,62.48 0 bottom
LOGO26  SFE_LOGO_NAME_FLAME.1_INCH  [SFE_LOGO_NAME_FLAME_.1]  89.92,60.96 0 bottom
LOGO27  SFE_LOGO_NAME_FLAME.1_INCH  [SFE_LOGO_NAME_FLAME_.1]  78.11,60.96 0 top
LOGO28  OSHW-LOGOS  [OSHW-LOGO-S]  74.68,62.48 0 top
LOGO29  OSHW-LOGOS  [OSHW-LOGO-S]  105.66,62.48 0 bottom
LOGO30  SFE_LOGO_NAME_FLAME.1_INCH  [SFE_LOGO_NAME_FLAME_.1]  120.9,60.96 0 bottom
LOGO31  SFE_LOGO_NAME_FLAME.1_INCH  [SFE_LOGO_NAME_FLAME_.1]  109.09,60.96 0 top
LOGO32  OSHW-LOGOS  [OSHW-LOGO-S]  105.66,62.48 0 top
LOGO33  OSHW-LOGOS  [OSHW-LOGO-S]  150.37,8.64 0 bottom
LOGO34  SFE_LOGO_NAME_FLAME.1_INCH  [SFE_LOGO_NAME_FLAME_.1]  165.61,7.11 0 bottom
LOGO35  SFE_LOGO_NAME_FLAME.1_INCH  [SFE_LOGO_NAME_FLAME_.1]  153.8,7.11 0 top
LOGO36  OSHW-LOGOS  [OSHW-LOGO-S]  150.37,8.64 0 top
LOGO37  OSHW-LOGOS  [OSHW-LOGO-S]  181.36,8.64 0 bottom
LOGO38  SFE_LOGO_NAME_FLAME.1_INCH  [SFE_LOGO_NAME_FLAME_.1]  196.6,7.11 0 bottom
LOGO39  SFE_LOGO_NAME_FLAME.1_INCH  [SFE_LOGO_NAME_FLAME_.1]  184.78,7.11 0 top
LOGO40  OSHW-LOGOS  [OSHW-LOGO-S]  181.36,8.64 0 top
LOGO41  OSHW-LOGOS  [OSHW-LOGO-S]  212.34,8.64 0 bottom
LOGO42  SFE_LOGO_NAME_FLAME.1_INCH  [SFE_LOGO_NAME_FLAME_.1]  227.58,7.11 0 bottom
LOGO43  SFE_LOGO_NAME_FLAME.1_INCH  [SFE_LOGO_NAME_FLAME_.1]  215.77,7.11 0 top
LOGO44  OSHW-LOGOS  [OSHW-LOGO-S]  212.34,8.64 0 top
LOGO45  OSHW-LOGOS  [OSHW-LOGO-S]  243.33,8.64 0 bottom
LOGO46  SFE_LOGO_NAME_FLAME.1_INCH  [SFE_LOGO_NAME_FLAME_.1]  258.57,7.11 0 bottom
LOGO47  SFE_LOGO_NAME_FLAME.1_INCH  [SFE_LOGO_NAME_FLAME_.1]  246.76,7.11 0 top
LOGO48  OSHW-LOGOS  [OSHW-LOGO-S]  243.33,8.64 0 top
LOGO49  OSHW-LOGOS  [OSHW-LOGO-S]  150.37,62.48 0 bottom
LOGO50  SFE_LOGO_NAME_FLAME.1_INCH  [SFE_LOGO_NAME_FLAME_.1]  165.61,60.96 0 bottom
LOGO51  SFE_LOGO_NAME_FLAME.1_INCH  [SFE_LOGO_NAME_FLAME_.1]  153.8,60.96 0 top
LOGO52  OSHW-LOGOS  [OSHW-LOGO-S]  150.37,62.48 0 top
LOGO53  OSHW-LOGOS  [OSHW-LOGO-S]  181.36,62.48 0 bottom
LOGO54  SFE_LOGO_NAME_FLAME.1_INCH  [SFE_LOGO_NAME_FLAME_.1]  196.6,60.96 0 bottom
LOGO55  SFE_LOGO_NAME_FLAME.1_INCH  [SFE_LOGO_NAME_FLAME_.1]  184.78,60.96 0 top
LOGO56  OSHW-LOGOS  [OSHW-LOGO-S]  181.36,62.48 0 top
LOGO57  OSHW-LOGOS  [OSHW-LOGO-S]  212.34,62.48 0 bottom
LOGO58  SFE_LOGO_NAME_FLAME.1_INCH  [SFE_LOGO_NAME_FLAME_.1]  227.58,60.96 0 bottom
LOGO59  SFE_LOGO_NAME_FLAME.1_INCH  [SFE_LOGO_NAME_FLAME_.1]  215.77,60.96 0 top
LOGO60  OSHW-LOGOS  [OSHW-LOGO-S]  212.34,62.48 0 top
LOGO61  OSHW-LOGOS  [OSHW-LOGO-S]  243.33,62.48 0 bottom
LOGO62  SFE_LOGO_NAME_FLAME.1_INCH  [SFE_LOGO_NAME_FLAME_.1]  258.57,60.96 0 bottom
LOGO63  SFE_LOGO_NAME_FLAME.1_INCH  [SFE_LOGO_NAME_FLAME_.1]  246.76,60.96 0 top
LOGO64  OSHW-LOGOS  [OSHW-LOGO-S]  243.33,62.48 0 top
LOGO65  OSHW-LOGOS  [OSHW-LOGO-S]  12.7,130.05 0 bottom
LOGO66  SFE_LOGO_NAME_FLAME.1_INCH  [SFE_LOGO_NAME_FLAME_.1]  27.94,128.52 0 bottom
LOGO67  SFE_LOGO_NAME_FLAME.1_INCH  [SFE_LOGO_NAME_FLAME_.1]  16.13,128.52 0 top
LOGO68  OSHW-LOGOS  [OSHW-LOGO-S]  12.7,130.05 0 top
LOGO69  OSHW-LOGOS  [OSHW-LOGO-S]  43.69,130.05 0 bottom
LOGO70  SFE_LOGO_NAME_FLAME.1_INCH  [SFE_LOGO_NAME_FLAME_.1]  58.93,128.52 0 bottom
LOGO71  SFE_LOGO_NAME_FLAME.1_INCH  [SFE_LOGO_NAME_FLAME_.1]  47.12,128.52 0 top
LOGO72  OSHW-LOGOS  [OSHW-LOGO-S]  43.69,130.05 0 top
LOGO73  OSHW-LOGOS  [OSHW-LOGO-S]  74.68,130.05 0 bottom
LOGO74  SFE_LOGO_NAME_FLAME.1_INCH  [SFE_LOGO_NAME_FLAME_.1]  89.92,128.52 0 bottom
LOGO75  SFE_LOGO_NAME_FLAME.1_INCH  [SFE_LOGO_NAME_FLAME_.1]  78.11,128.52 0 top
LOGO76  OSHW-LOGOS  [OSHW-LOGO-S]  74.68,130.05 0 top
LOGO77  OSHW-LOGOS  [OSHW-LOGO-S]  105.66,130.05 0 bottom
LOGO78  SFE_LOGO_NAME_FLAME.1_INCH  [SFE_LOGO_NAME_FLAME_.1]  120.9,128.52 0 bottom
LOGO79  SFE_LOGO_NAME_FLAME.1_INCH  [SFE_LOGO_NAME_FLAME_.1]  109.09,128.52 0 top
LOGO80  OSHW-LOGOS  [OSHW-LOGO-S]  105.66,130.05 0 top
LOGO81  OSHW-LOGOS  [OSHW-LOGO-S]  12.7,183.9 0 bottom
LOGO82  SFE_LOGO_NAME_FLAME.1_INCH  [SFE_LOGO_NAME_FLAME_.1]  27.94,182.37 0 bottom
LOGO83  SFE_LOGO_NAME_FLAME.1_INCH  [SFE_LOGO_NAME_FLAME_.1]  16.13,182.37 0 top
LOGO84  OSHW-LOGOS  [OSHW-LOGO-S]  12.7,183.9 0 top
LOGO85  OSHW-LOGOS  [OSHW-LOGO-S]  43.69,183.9 0 bottom
LOGO86  SFE_LOGO_NAME_FLAME.1_INCH  [SFE_LOGO_NAME_FLAME_.1]  58.93,182.37 0 bottom
LOGO87  SFE_LOGO_NAME_FLAME.1_INCH  [SFE_LOGO_NAME_FLAME_.1]  47.12,182.37 0 top
LOGO88  OSHW-LOGOS  [OSHW-LOGO-S]  43.69,183.9 0 top
LOGO89  OSHW-LOGOS  [OSHW-LOGO-S]  74.68,183.9 0 bottom
LOGO90  SFE_LOGO_NAME_FLAME.1_INCH  [SFE_LOGO_NAME_FLAME_.1]  89.92,182.37 0 bottom
LOGO91  SFE_LOGO_NAME_FLAME.1_INCH  [SFE_LOGO_NAME_FLAME_.1]  78.11,182.37 0 top
LOGO92  OSHW-LOGOS  [OSHW-LOGO-S]  74.68,183.9 0 top
LOGO93  OSHW-LOGOS  [OSHW-LOGO-S]  105.66,183.9 0 bottom
LOGO94  SFE_LOGO_NAME_FLAME.1_INCH  [SFE_LOGO_NAME_FLAME_.1]  120.9,182.37 0 bottom
LOGO95  SFE_LOGO_NAME_FLAME.1_INCH  [SFE_LOGO_NAME_FLAME_.1]  109.09,182.37 0 top
LOGO96  OSHW-LOGOS  [OSHW-LOGO-S]  105.66,183.9 0 top
LOGO97  OSHW-LOGOS  [OSHW-LOGO-S]  150.37,130.05 0 bottom
LOGO98  SFE_LOGO_NAME_FLAME.1_INCH  [SFE_LOGO_NAME_FLAME_.1]  165.61,128.52 0 bottom
LOGO99  SFE_LOGO_NAME_FLAME.1_INCH  [SFE_LOGO_NAME_FLAME_.1]  153.8,128.52 0 top
LOGO100  OSHW-LOGOS  [OSHW-LOGO-S]  150.37,130.05 0 top
LOGO101  OSHW-LOGOS  [OSHW-LOGO-S]  181.36,130.05 0 bottom
LOGO102  SFE_LOGO_NAME_FLAME.1_INCH  [SFE_LOGO_NAME_FLAME_.1]  196.6,128.52 0 bottom
LOGO103  SFE_LOGO_NAME_FLAME.1_INCH  [SFE_LOGO_NAME_FLAME_.1]  184.78,128.52 0 top
LOGO104  OSHW-LOGOS  [OSHW-LOGO-S]  181.36,130.05 0 top
LOGO105  OSHW-LOGOS  [OSHW-LOGO-S]  212.34,130.05 0 bottom
LOGO106  SFE_LOGO_NAME_FLAME.1_INCH  [SFE_LOGO_NAME_FLAME_.1]  227.58,128.52 0 bottom
LOGO107  SFE_LOGO_NAME_FLAME.1_INCH  [SFE_LOGO_NAME_FLAME_.1]  215.77,128.52 0 top
LOGO108  OSHW-LOGOS  [OSHW-LOGO-S]  212.34,130.05 0 top
LOGO109  OSHW-LOGOS  [OSHW-LOGO-S]  243.33,130.05 0 bottom
LOGO110  SFE_LOGO_NAME_FLAME.1_INCH  [SFE_LOGO_NAME_FLAME_.1]  258.57,128.52 0 bottom
LOGO111  SFE_LOGO_NAME_FLAME.1_INCH  [SFE_LOGO_NAME_FLAME_.1]  246.76,128.52 0 top
LOGO112  OSHW-LOGOS  [OSHW-LOGO-S]  243.33,130.05 0 top
LOGO113  OSHW-LOGOS  [OSHW-LOGO-S]  150.37,183.9 0 bottom
LOGO114  SFE_LOGO_NAME_FLAME.1_INCH  [SFE_LOGO_NAME_FLAME_.1]  165.61,182.37 0 bottom
LOGO115  SFE_LOGO_NAME_FLAME.1_INCH  [SFE_LOGO_NAME_FLAME_.1]  153.8,182.37 0 top
LOGO116  OSHW-LOGOS  [OSHW-LOGO-S]  150.37,183.9 0 top
LOGO117  OSHW-LOGOS  [OSHW-LOGO-S]  181.36,183.9 0 bottom
LOGO118  SFE_LOGO_NAME_FLAME.1_INCH  [SFE_LOGO_NAME_FLAME_.1]  196.6,182.37 0 bottom
LOGO119  SFE_LOGO_NAME_FLAME.1_INCH  [SFE_LOGO_NAME_FLAME_.1]  184.78,182.37 0 top
LOGO120  OSHW-LOGOS  [OSHW-LOGO-S]  181.36,183.9 0 top
LOGO121  OSHW-LOGOS  [OSHW-LOGO-S]  212.34,183.9 0 bottom
LOGO122  SFE_LOGO_NAME_FLAME.1_INCH  [SFE_LOGO_NAME_FLAME_.1]  227.58,182.37 0 bottom
LOGO123  SFE_LOGO_NAME_FLAME.1_INCH  [SFE_LOGO_NAME_FLAME_.1]  215.77,182.37 0 top
LOGO124  OSHW-LOGOS  [OSHW-LOGO-S]  212.34,183.9 0 top
LOGO125  OSHW-LOGOS  [OSHW-LOGO-S]  243.33,183.9 0 bottom
LOGO126  SFE_LOGO_NAME_FLAME.1_INCH  [SFE_LOGO_NAME_FLAME_.1]  258.57,182.37 0 bottom
LOGO127  SFE_LOGO_NAME_FLAME.1_INCH  [SFE_LOGO_NAME_FLAME_.1]  246.76,182.37 0 top
LOGO128  OSHW-LOGOS  [OSHW-LOGO-S]  243.33,183.9 0 top
R1  10K  [0603-RES]  23.37,27.18 0 top
R2  10K  [0603-RES]  18.92,27.18 180 top
R3  200k  [0603-RES]  18.92,24 180 top
R4  DNP  [0603-RES]  19.56,17.02 180 top
R5  DNP  [0603-RES]  19.56,15.37 180 top
R6  1K  [0603-RES]  13.21,45.59 270 top
R7  1K  [0603-RES]  15.11,45.59 270 top
R8  1K  [0603-RES]  17.02,45.59 270 top
R9  1K  [0603-RES]  18.92,45.59 270 top
R10  1K  [0603-RES]  20.83,45.59 270 top
R11  1K  [0603-RES]  22.73,45.59 270 top
R12  1K  [0603-RES]  24.64,45.59 270 top
R13  1K  [0603-RES]  26.54,45.59 270 top
R14  1K  [0603-RES]  11.94,18.29 180 top
R15  1K  [0603-RES]  11.94,20.83 180 top
R16  1K  [0603-RES]  11.94,23.37 180 top
R17  1K  [0603-RES]  11.94,25.91 180 top
R18  1K  [0603-RES]  11.94,28.45 180 top
R19  1K  [0603-RES]  11.94,30.99 180 top
R20  10K  [0603-RES]  54.36,27.18 0 top
R21  10K  [0603-RES]  49.91,27.18 180 top
R22  200k  [0603-RES]  49.91,24 180 top
R23  DNP  [0603-RES]  50.55,17.02 180 top
R24  DNP  [0603-RES]  50.55,15.37 180 top
R25  1K  [0603-RES]  44.2,45.59 270 top
R26  1K  [0603-RES]  46.1,45.59 270 top
R27  1K  [0603-RES]  48.01,45.59 270 top
R28  1K  [0603-RES]  49.91,45.59 270 top
R29  1K  [0603-RES]  51.82,45.59 270 top
R30  1K  [0603-RES]  53.72,45.59 270 top
R31  1K  [0603-RES]  55.63,45.59 270 top
R32  1K  [0603-RES]  57.53,45.59 270 top
R33  1K  [0603-RES]  42.93,18.29 180 top
R34  1K  [0603-RES]  42.93,20.83 180 top
R35  1K  [0603-RES]  42.93,23.37 180 top
R36  1K  [0603-RES]  42.93,25.91 180 top
R37  1K  [0603-RES]  42.93,28.45 180 top
R38  1K  [0603-RES]  42.93,30.99 180 top
R39  10K  [0603-RES]  85.34,27.18 0 top
R40  10K  [0603-RES]  80.9,27.18 180 top
R41  200k  [0603-RES]  80.9,24 180 top
R42  DNP  [0603-RES]  81.53,17.02 180 top
R43  DNP  [0603-RES]  81.53,15.37 180 top
R44  1K  [0603-RES]  75.18,45.59 270 top
R45  1K  [0603-RES]  77.09,45.59 270 top
R46  1K  [0603-RES]  78.99,45.59 270 top
R47  1K  [0603-RES]  80.9,45.59 270 top
R48  1K  [0603-RES]  82.8,45.59 270 top
R49  1K  [0603-RES]  84.71,45.59 270 top
R50  1K  [0603-RES]  86.61,45.59 270 top
R51  1K  [0603-RES]  88.52,45.59 270 top
R52  1K  [0603-RES]  73.91,18.29 180 top
R53  1K  [0603-RES]  73.91,20.83 180 top
R54  1K  [0603-RES]  73.91,23.37 180 top
R55  1K  [0603-RES]  73.91,25.91 180 top
R56  1K  [0603-RES]  73.91,28.45 180 top
R57  1K  [0603-RES]  73.91,30.99 180 top
R58  10K  [0603-RES]  116.33,27.18 0 top
R59  10K  [0603-RES]  111.89,27.18 180 top
R60  200k  [0603-RES]  111.89,24 180 top
R61  DNP  [0603-RES]  112.52,17.02 180 top
R62  DNP  [0603-RES]  112.52,15.37 180 top
R63  1K  [0603-RES]  106.17,45.59 270 top
R64  1K  [0603-RES]  108.08,45.59 270 top
R65  1K  [0603-RES]  109.98,45.59 270 top
R66  1K  [0603-RES]  111.89,45.59 270 top
R67  1K  [0603-RES]  113.79,45.59 270 top
R68  1K  [0603-RES]  115.7,45.59 270 top
R69  1K  [0603-RES]  117.6,45.59 270 top
R70  1K  [0603-RES]  119.51,45.59 270 top
R71  1K  [0603-RES]  104.9,18.29 180 top
R72  1K  [0603-RES]  104.9,20.83 180 top
R73  1K  [0603-RES]  104.9,23.37 180 top
R74  1K  [0603-RES]  104.9,25.91 180 top
R75  1K  [0603-RES]  104.9,28.45 180 top
R76  1K  [0603-RES]  104.9,30.99 180 top
R77  10K  [0603-RES]  23.37,81.03 0 top
R78  10K  [0603-RES]  18.92,81.03 180 top
R79  200k  [0603-RES]  18.92,77.85 180 top
R80  DNP  [0603-RES]  19.56,70.87 180 top
R81  DNP  [0603-RES]  19.56,69.22 180 top
R82  1K  [0603-RES]  13.21,99.44 270 top
R83  1K  [0603-RES]  15.11,99.44 270 top
R84  1K  [0603-RES]  17.02,99.44 270 top
R85  1K  [0603-RES]  18.92,99.44 270 top
R86  1K  [0603-RES]  20.83,99.44 270 top
R87  1K  [0603-RES]  22.73,99.44 270 top
R88  1K  [0603-RES]  24.64,99.44 270 top
R89  1K  [0603-RES]  26.54,99.44 270 top
R90  1K  [0603-RES]  11.94,72.14 180 top
R91  1K  [0603-RES]  11.94,74.68 180 top
R92  1K  [0603-RES]  11.94,77.22 180 top
R93  1K  [0603-RES]  11.94,79.76 180 top
R94  1K  [0603-RES]  11.94,82.3 180 top
R95  1K  [0603-RES]  11.94,84.84 180 top
R96  10K  [0603-RES]  54.36,81.03 0 top
R97  10K  [0603-RES]  49.91,81.03 180 top
R98  200k  [0603-RES]  49.91,77.85 180 top
R99  DNP  [0603-RES]  50.55,70.87 180 top
R100  DNP  [0603-RES]  50.55,69.22 180 top
R101  1K  [0603-RES]  44.2,99.44 270 top
R102  1K  [0603-RES]  46.1,99.44 270 top
R103  1K  [0603-RES]  48.01,99.44 270 top
R104  1K  [0603-RES]  49.91,99.44 270 top
R105  1K  [0603-RES]  51.82,99.44 270 top
R106  1K  [0603-RES]  53.72,99.44 270 top
R107  1K  [0603-RES]  55.63,99.44 270 top
R108  1K  [0603-RES]  57.53,99.44 270 top
R109  1K  [0603-RES]  42.93,72.14 180 top
R110  1K  [0603-RES]  42.93,74.68 180 top
R111  1K  [0603-RES]  42.93,77.22 180 top
R112  1K  [0603-RES]  42.93,79.76 180 top
R113  1K  [0603-RES]  42.93,82.3 180 top
R114  1K  [0603-RES]  42.93,84.84 180 top
R115  10K  [0603-RES]  85.34,81.03 0 top
R116  10K  [0603-RES]  80.9,81.03 180 top
R117  200k  [0603-RES]  80.9,77.85 180 top
R118  DNP  [0603-RES]  81.53,70.87 180 top
R119  DNP  [0603-RES]  81.53,69.22 180 top
R120  1K  [0603-RES]  75.18,99.44 270 top
R121  1K  [0603-RES]  77.09,99.44 270 top
R122  1K  [0603-RES]  78.99,99.44 270 top
R123  1K  [0603-RES]  80.9,99.44 270 top
R124  1K  [0603-RES]  82.8,99.44 270 top
R125  1K  [0603-RES]  84.71,99.44 270 top
R126  1K  [0603-RES]  86.61,99.44 270 top
R127  1K  [0603-RES]  88.52,99.44 270 top
R128  1K  [0603-RES]  73.91,72.14 180 top
R129  1K  [0603-RES]  73.91,74.68 180 top
R130  1K  [0603-RES]  73.91,77.22 180 top
R131  1K  [0603-RES]  73.91,79.76 180 top
R132  1K  [0603-RES]  73.91,82.3 180 top
R133  1K  [0603-RES]  73.91,84.84 180 top
R134  10K  [0603-RES]  116.33,81.03 0 top
R135  10K  [0603-RES]  111.89,81.03 180 top
R136  200k  [0603-RES]  111.89,77.85 180 top
R137  DNP  [0603-RES]  112.52,70.87 180 top
R138  DNP  [0603-RES]  112.52,69.22 180 top
R139  1K  [0603-RES]  106.17,99.44 270 top
R140  1K  [0603-RES]  108.08,99.44 270 top
R141  1K  [0603-RES]  109.98,99.44 270 top
R142  1K  [0603-RES]  111.89,99.44 270 top
R143  1K  [0603-RES]  113.79,99.44 270 top
R144  1K  [0603-RES]  115.7,99.44 270 top
R145  1K  [0603-RES]  117.6,99.44 270 top
R146  1K  [0603-RES]  119.51,99.44 270 top
R147  1K  [0603-RES]  104.9,72.14 180 top
R148  1K  [0603-RES]  104.9,74.68 180 top
R149  1K  [0603-RES]  104.9,77.22 180 top
R150  1K  [0603-RES]  104.9,79.76 180 top
R151  1K  [0603-RES]  104.9,82.3 180 top
R152  1K  [0603-RES]  104.9,84.84 180 top
R153  10K  [0603-RES]  161.04,27.18 0 top
R154  10K  [0603-RES]  156.59,27.18 180 top
R155  200k  [0603-RES]  156.59,24 180 top
R156  DNP  [0603-RES]  157.23,17.02 180 top
R157  DNP  [0603-RES]  157.23,15.37 180 top
R158  1K  [0603-RES]  150.88,45.59 270 top
R159  1K  [0603-RES]  152.78,45.59 270 top
R160  1K  [0603-RES]  154.69,45.59 270 top
R161  1K  [0603-RES]  156.59,45.59 270 top
R162  1K  [0603-RES]  158.5,45.59 270 top
R163  1K  [0603-RES]  160.4,45.59 270 top
R164  1K  [0603-RES]  162.31,45.59 270 top
R165  1K  [0603-RES]  164.21,45.59 270 top
R166  1K  [0603-RES]  149.61,18.29 180 top
R167  1K  [0603-RES]  149.61,20.83 180 top
R168  1K  [0603-RES]  149.61,23.37 180 top
R169  1K  [0603-RES]  149.61,25.91 180 top
R170  1K  [0603-RES]  149.61,28.45 180 top
R171  1K  [0603-RES]  149.61,30.99 180 top
R172  10K  [0603-RES]  192.02,27.18 0 top
R173  10K  [0603-RES]  187.58,27.18 180 top
R174  200k  [0603-RES]  187.58,24 180 top
R175  DNP  [0603-RES]  188.21,17.02 180 top
R176  DNP  [0603-RES]  188.21,15.37 180 top
R177  1K  [0603-RES]  181.86,45.59 270 top
R178  1K  [0603-RES]  183.77,45.59 270 top
R179  1K  [0603-RES]  185.67,45.59 270 top
R180  1K  [0603-RES]  187.58,45.59 270 top
R181  1K  [0603-RES]  189.48,45.59 270 top
R182  1K  [0603-RES]  191.39,45.59 270 top
R183  1K  [0603-RES]  193.29,45.59 270 top
R184  1K  [0603-RES]  195.2,45.59 270 top
R185  1K  [0603-RES]  180.59,18.29 180 top
R186  1K  [0603-RES]  180.59,20.83 180 top
R187  1K  [0603-RES]  180.59,23.37 180 top
R188  1K  [0603-RES]  180.59,25.91 180 top
R189  1K  [0603-RES]  180.59,28.45 180 top
R190  1K  [0603-RES]  180.59,30.99 180 top
R191  10K  [0603-RES]  223.01,27.18 0 top
R192  10K  [0603-RES]  218.57,27.18 180 top
R193  200k  [0603-RES]  218.57,24 180 top
R194  DNP  [0603-RES]  219.2,17.02 180 top
R195  DNP  [0603-RES]  219.2,15.37 180 top
R196  1K  [0603-RES]  212.85,45.59 270 top
R197  1K  [0603-RES]  214.76,45.59 270 top
R198  1K  [0603-RES]  216.66,45.59 270 top
R199  1K  [0603-RES]  218.57,45.59 270 top
R200  1K  [0603-RES]  220.47,45.59 270 top
R201  1K  [0603-RES]  222.38,45.59 270 top
R202  1K  [0603-RES]  224.28,45.59 270 top
R203  1K  [0603-RES]  226.19,45.59 270 top
R204  1K  [0603-RES]  211.58,18.29 180 top
R205  1K  [0603-RES]  211.58,20.83 180 top
R206  1K  [0603-RES]  211.58,23.37 180 top
R207  1K  [0603-RES]  211.58,25.91 180 top
R208  1K  [0603-RES]  211.58,28.45 180 top
R209  1K  [0603-RES]  211.58,30.99 180 top
R210  10K  [0603-RES]  254,27.18 0 top
R211  10K  [0603-RES]  249.56,27.18 180 top
R212  200k  [0603-RES]  249.56,24 180 top
R213  DNP  [0603-RES]  250.19,17.02 180 top
R214  DNP  [0603-RES]  250.19,15.37 180 top
R215  1K  [0603-RES]  243.84,45.59 270 top
R216  1K  [0603-RES]  245.75,45.59 270 top
R217  1K  [0603-RES]  247.65,45.59 270 top
R218  1K  [0603-RES]  249.56,45.59 270 top
R219  1K  [0603-RES]  251.46,45.59 270 top
R220  1K  [0603-RES]  253.37,45.59 270 top
R221  1K  [0603-RES]  255.27,45.59 270 top
R222  1K  [0603-RES]  257.18,45.59 270 top
R223  1K  [0603-RES]  242.57,18.29 180 top
R224  1K  [0603-RES]  242.57,20.83 180 top
R225  1K  [0603-RES]  242.57,23.37 180 top
R226  1K  [0603-RES]  242.57,25.91 180 top
R227  1K  [0603-RES]  242.57,28.45 180 top
R228  1K  [0603-RES]  242.57,30.99 180 top
R229  10K  [0603-RES]  161.04,81.03 0 top
R230  10K  [0603-RES]  156.59,81.03 180 top
R231  200k  [0603-RES]  156.59,77.85 180 top
R232  DNP  [0603-RES]  157.23,70.87 180 top
R233  DNP  [0603-RES]  157.23,69.22 180 top
R234  1K  [0603-RES]  150.88,99.44 270 top
R235  1K  [0603-RES]  152.78,99.44 270 top
R236  1K  [0603-RES]  154.69,99.44 270 top
R237  1K  [0603-RES]  156.59,99.44 270 top
R238  1K  [0603-RES]  158.5,99.44 270 top
R239  1K  [0603-RES]  160.4,99.44 270 top
R240  1K  [0603-RES]  162.31,99.44 270 top
R241  1K  [0603-RES]  164.21,99.44 270 top